# Altium PCB 388D_Control_v1_PCB1.PcbDoc (part 1 of 7)
Units mil, origin at the board's own origin, x right, y up, seen from the top; angles counter-clockwise.
Board outline 3431 x 3800 mil, 6 copper layers (Top Layer, Singal Layer 2, Signal layer 3, Signal Layer 4, Signal Layer 5, Bottom Layer), stack 32.7 mil thick; 270 components, 383 nets, 1462 pads, 899 vias.
Unrouted connection lines stored in the file: 19.
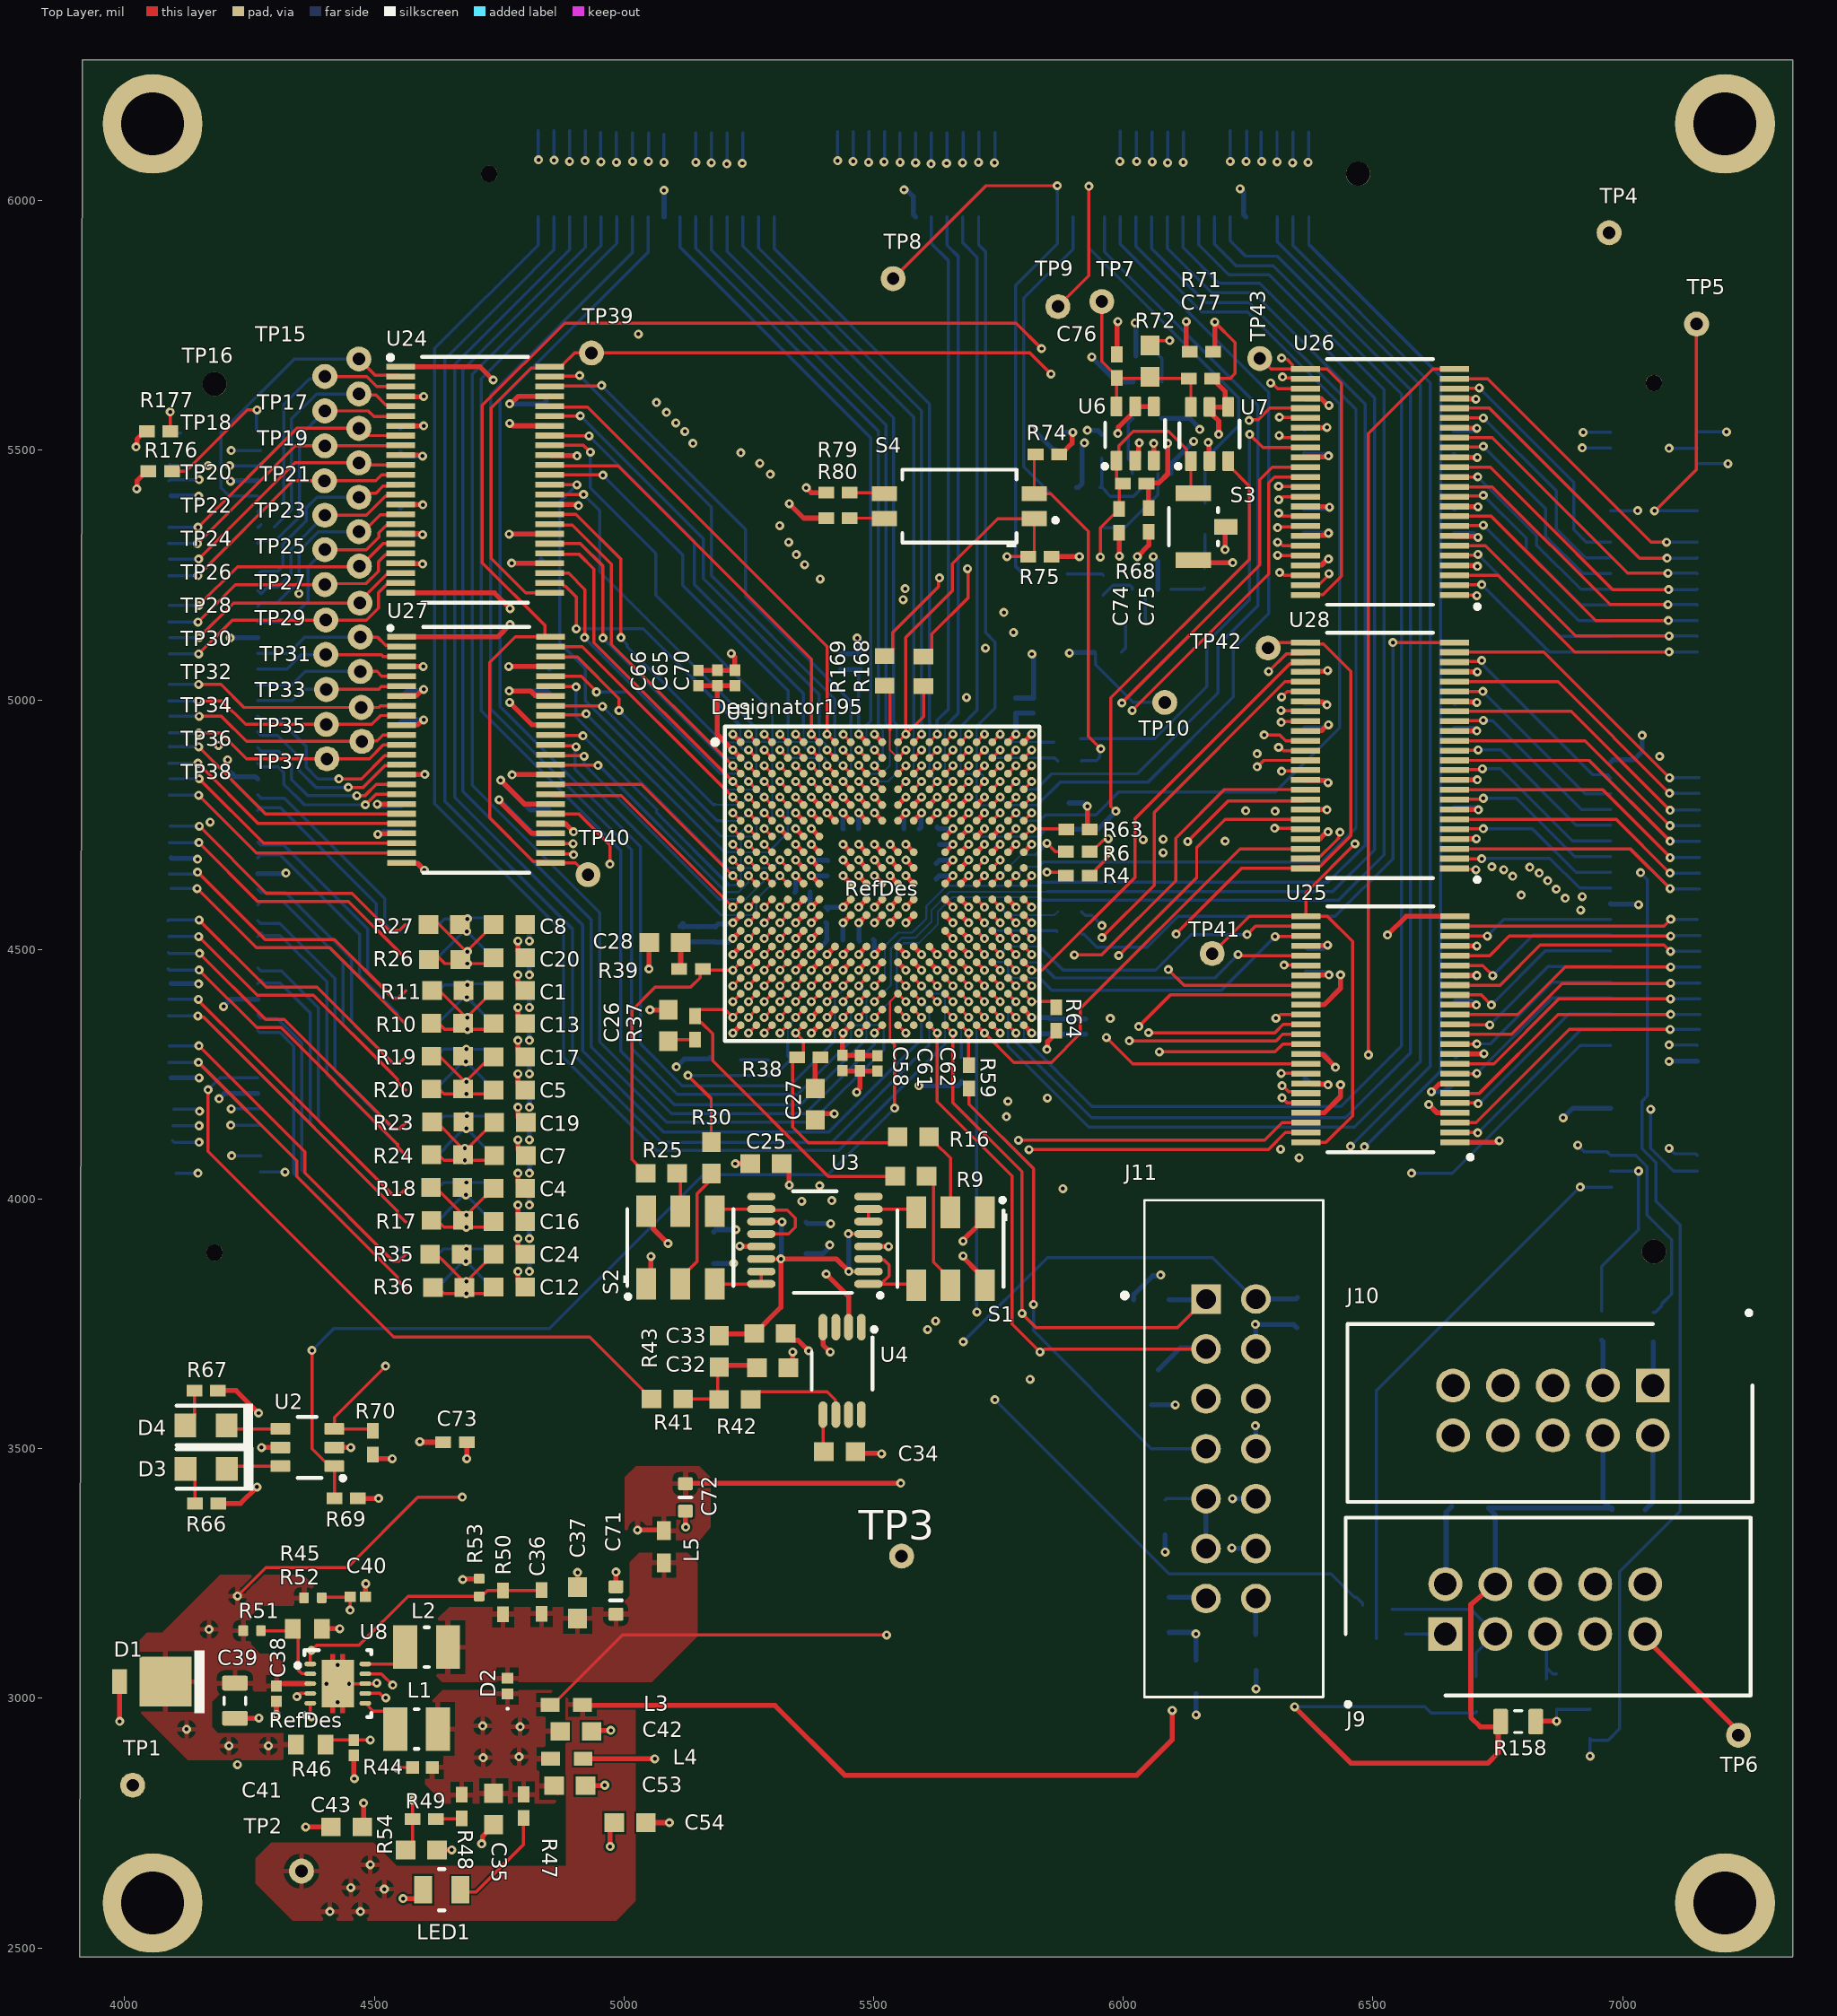
[diagram p0: Top Layer view]
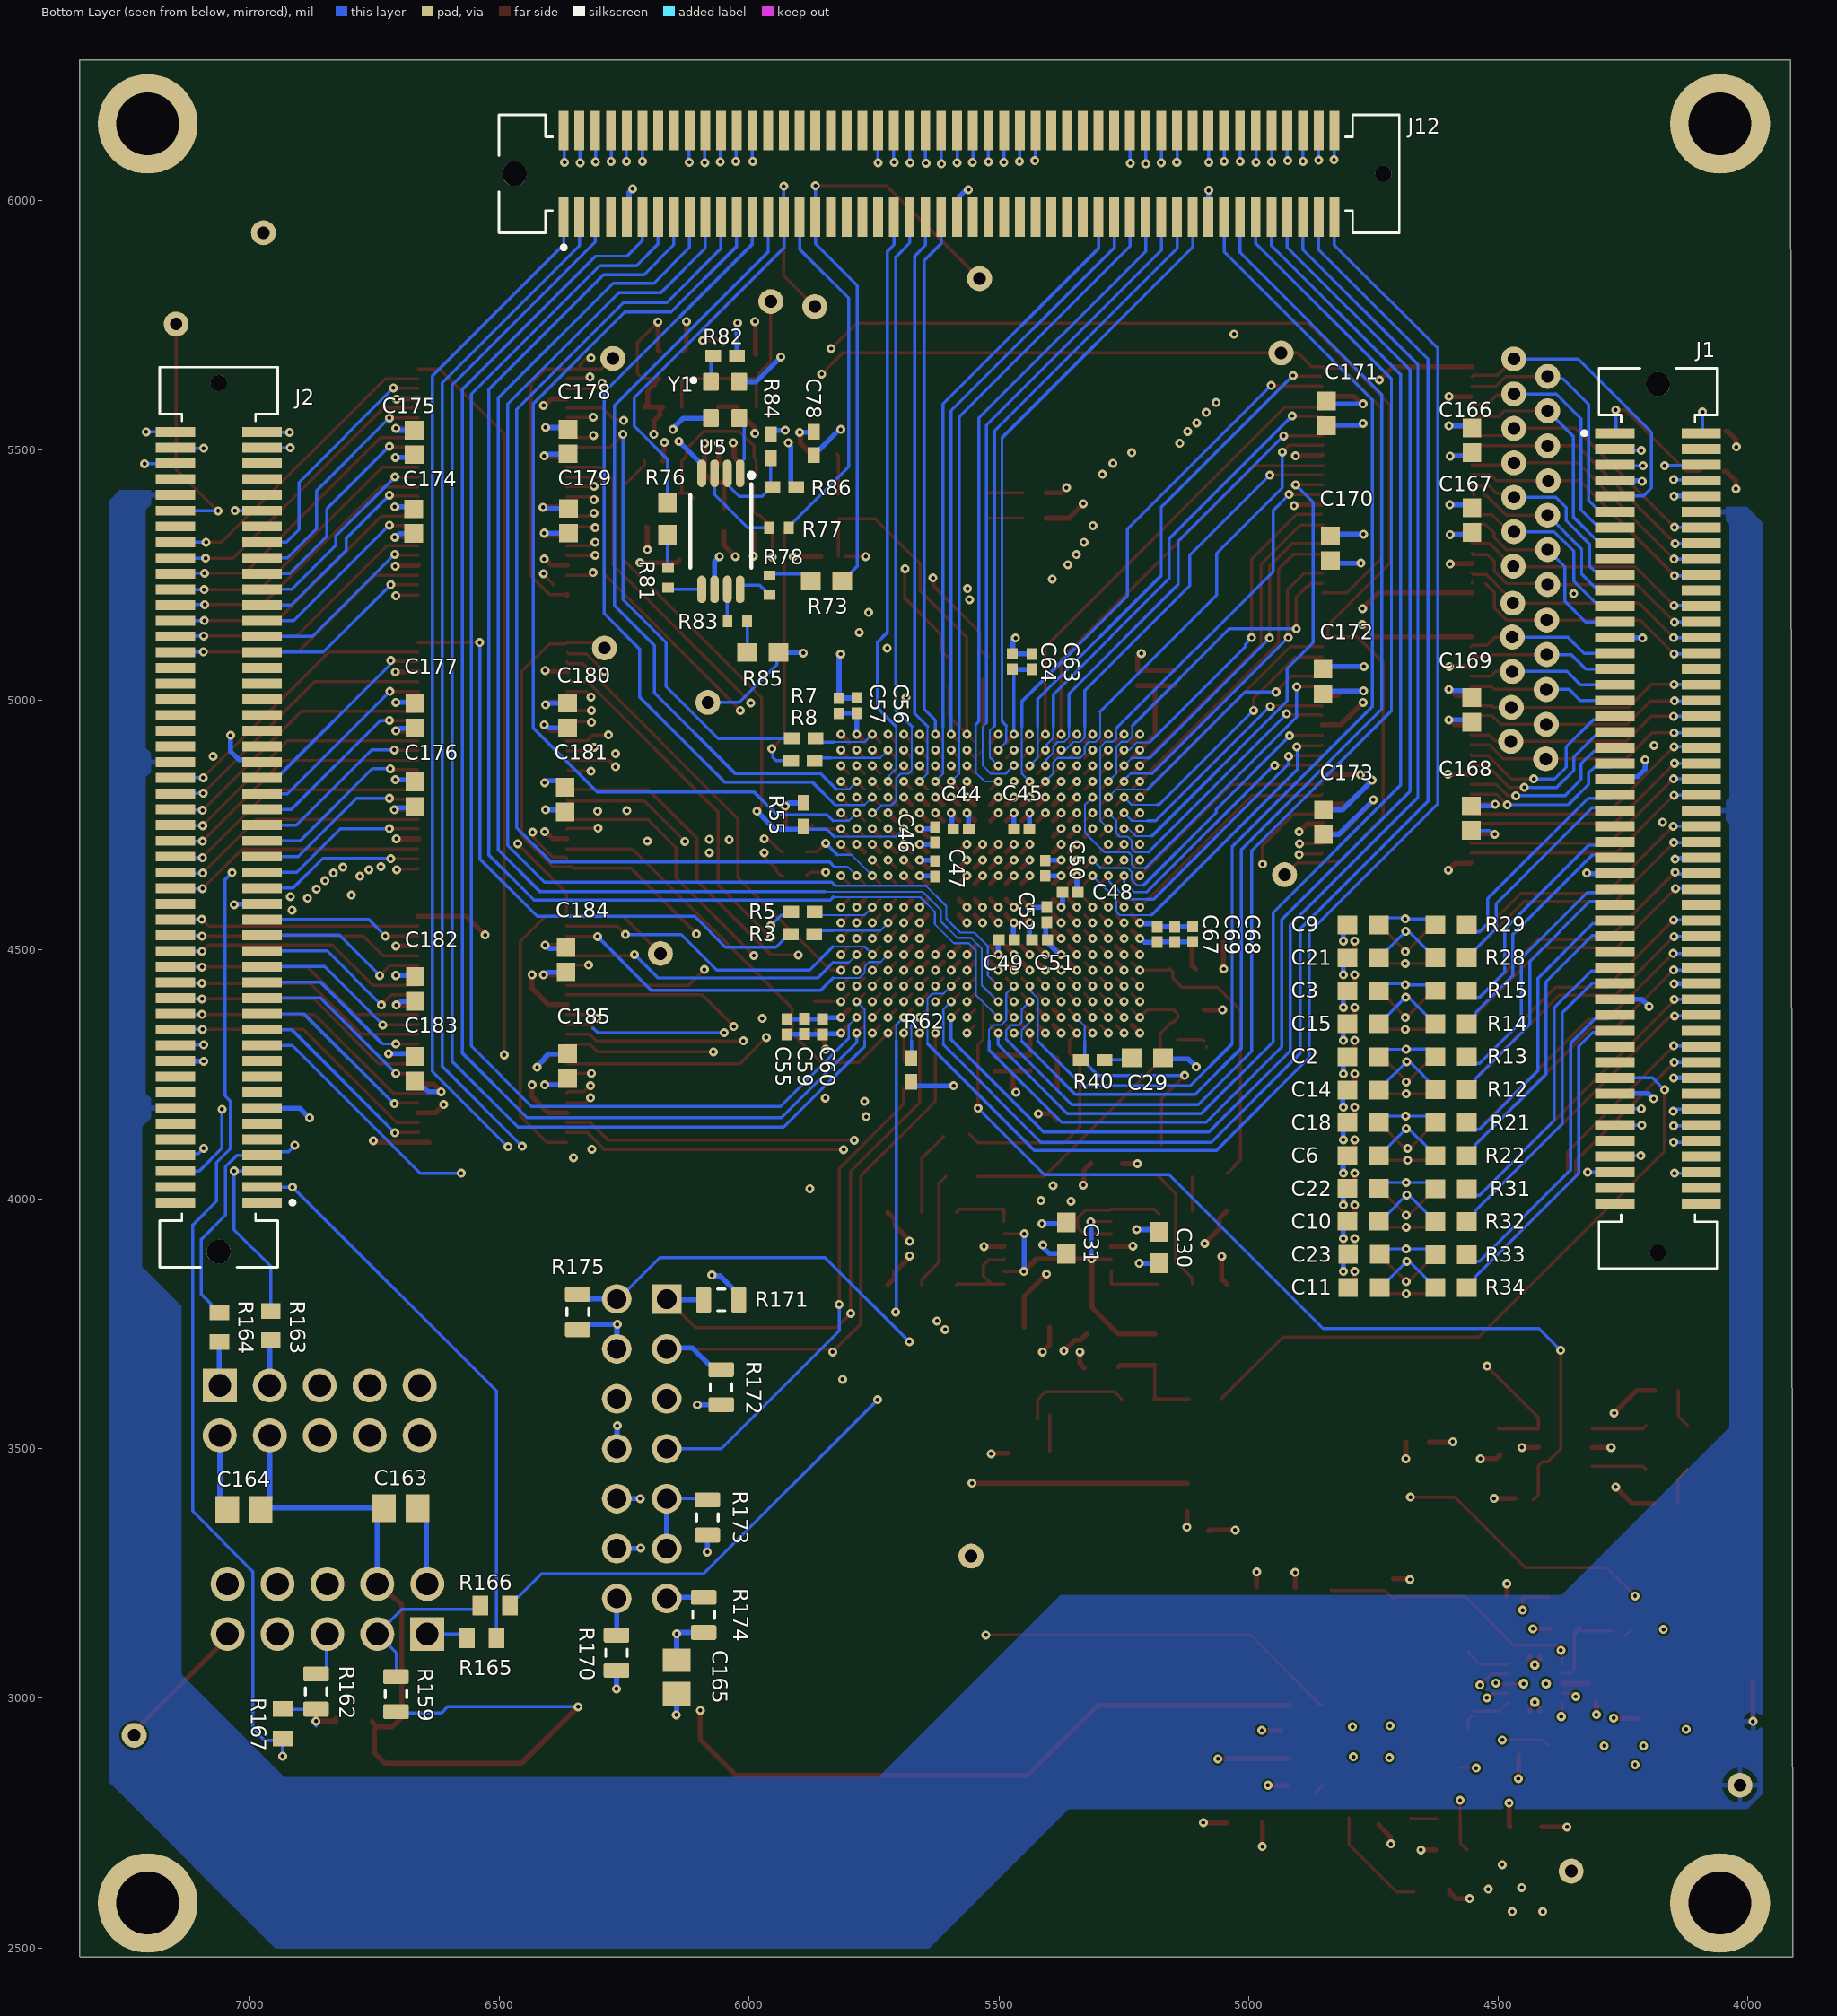
[diagram p1: Bottom Layer view, seen from below]
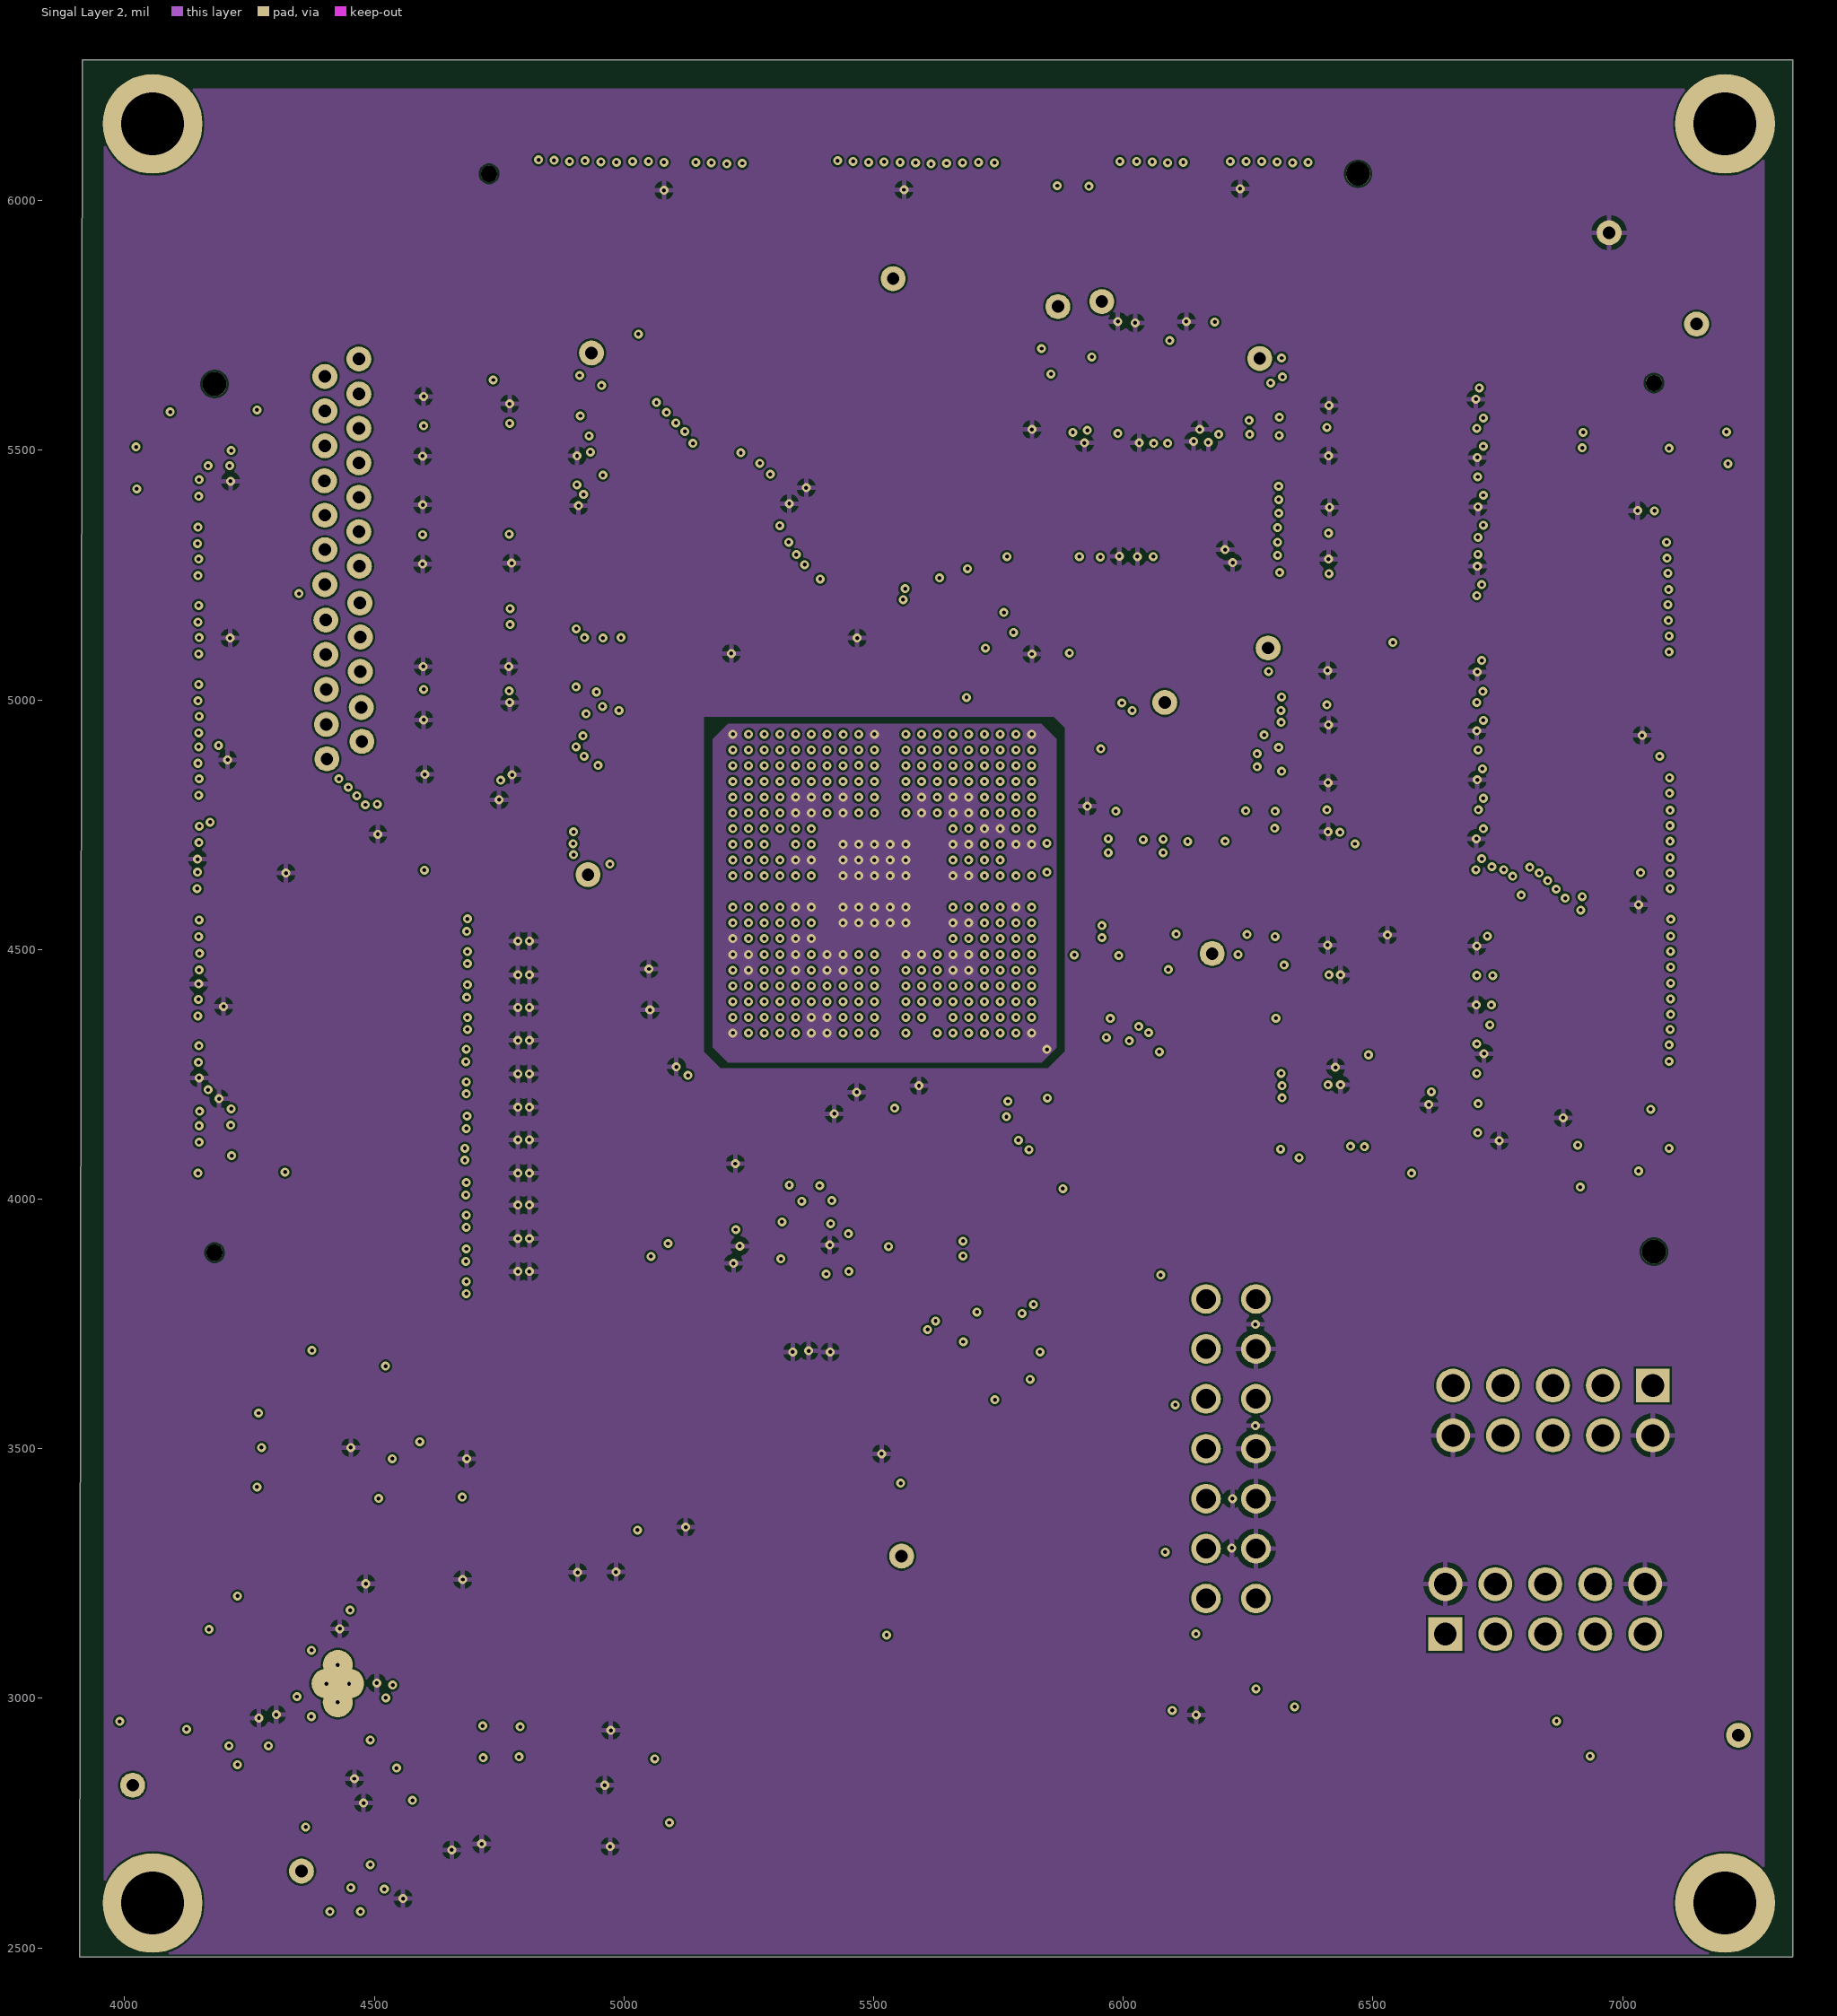
[diagram p2: Singal Layer 2]
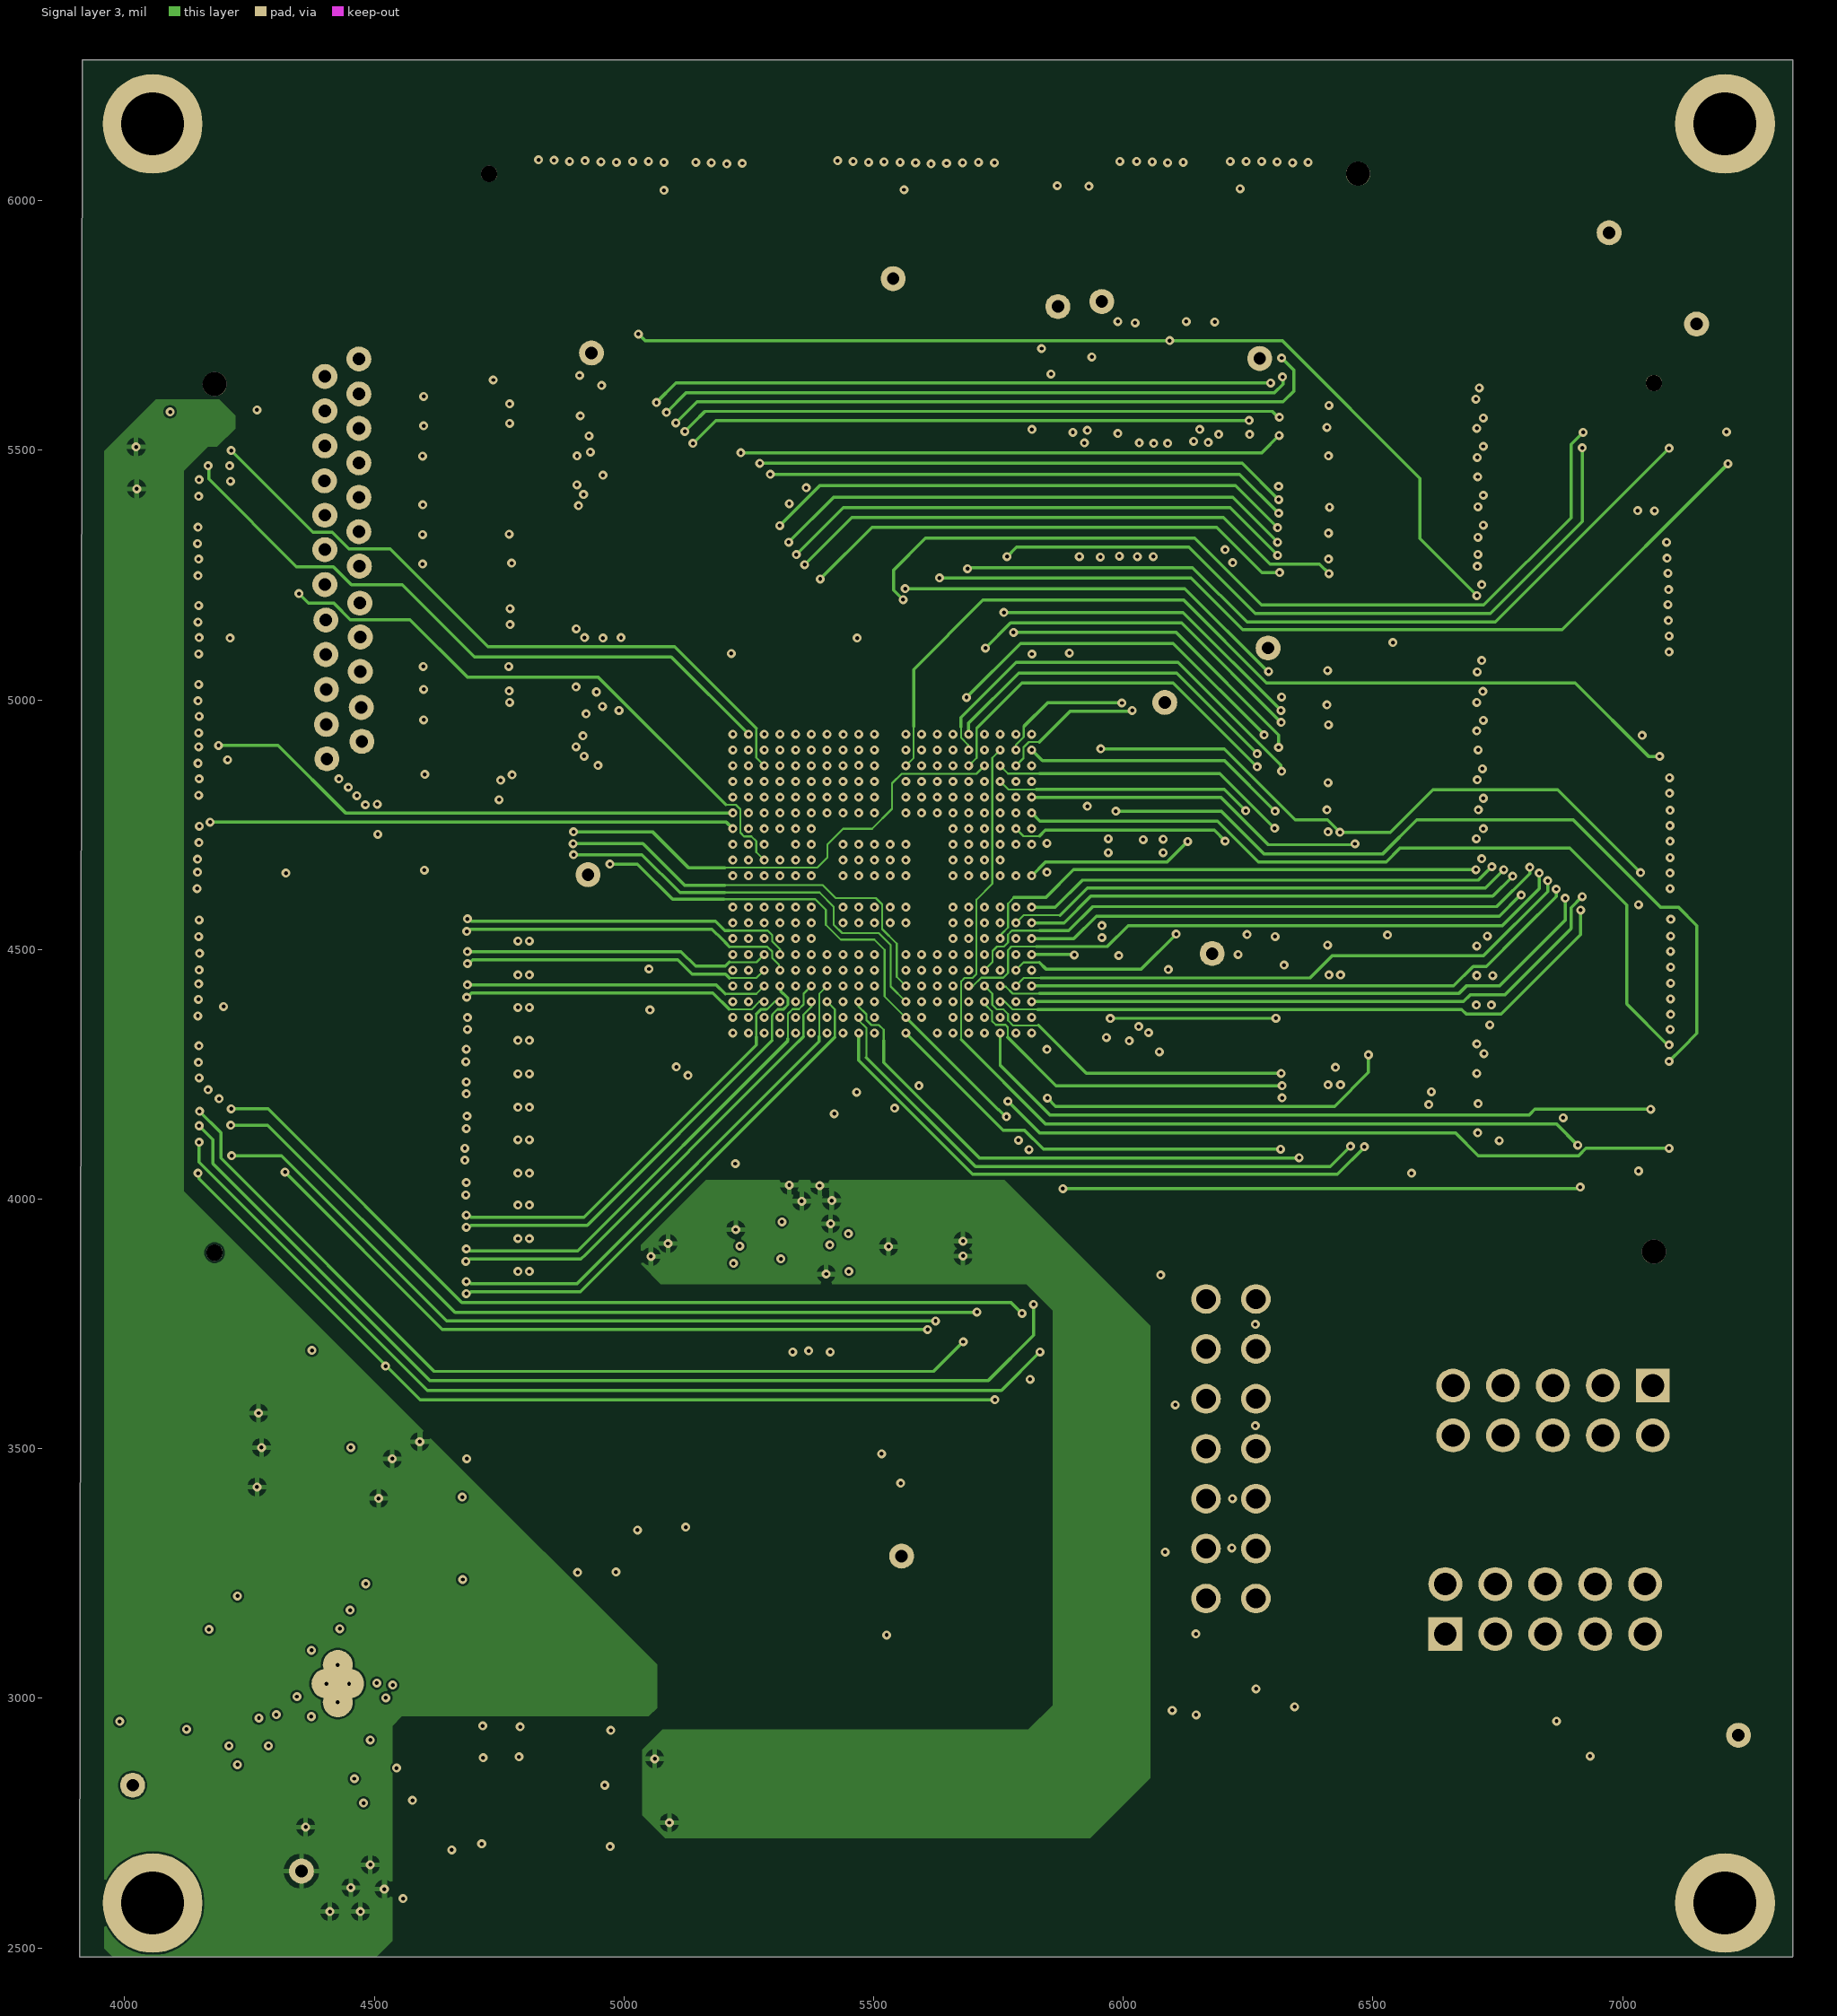
[diagram p3: Signal layer 3]
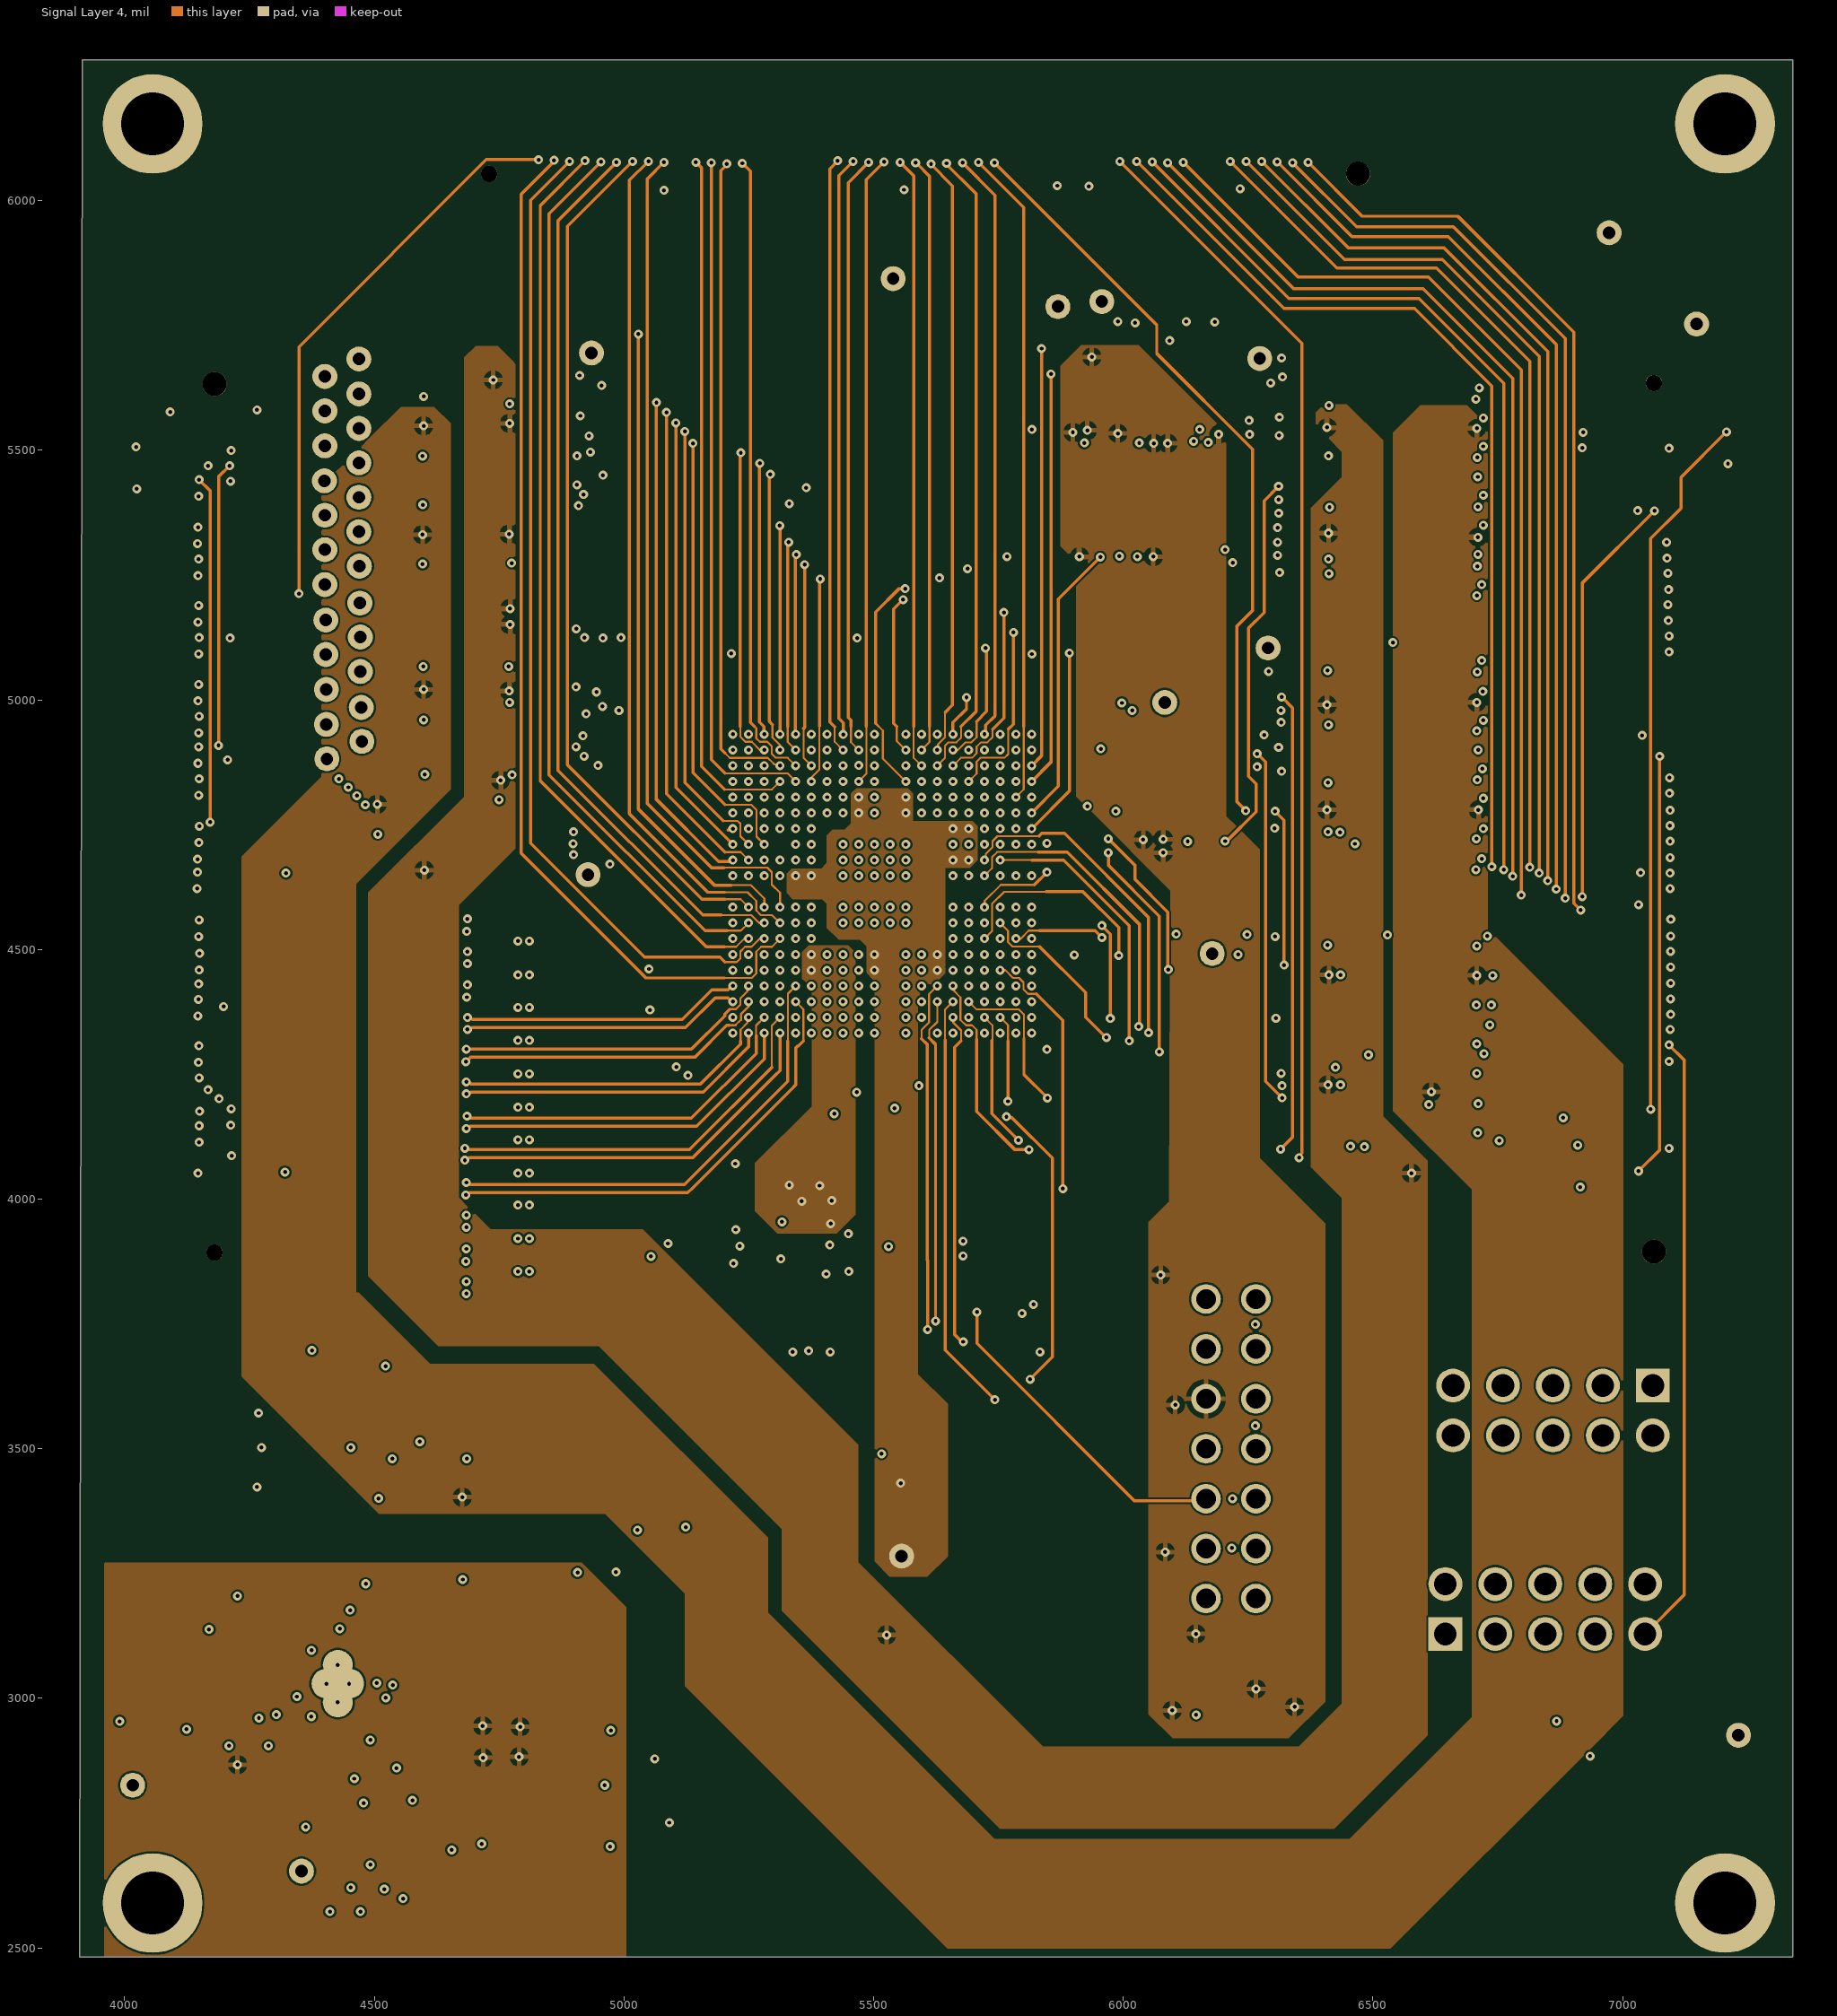
[diagram p4: Signal Layer 4]
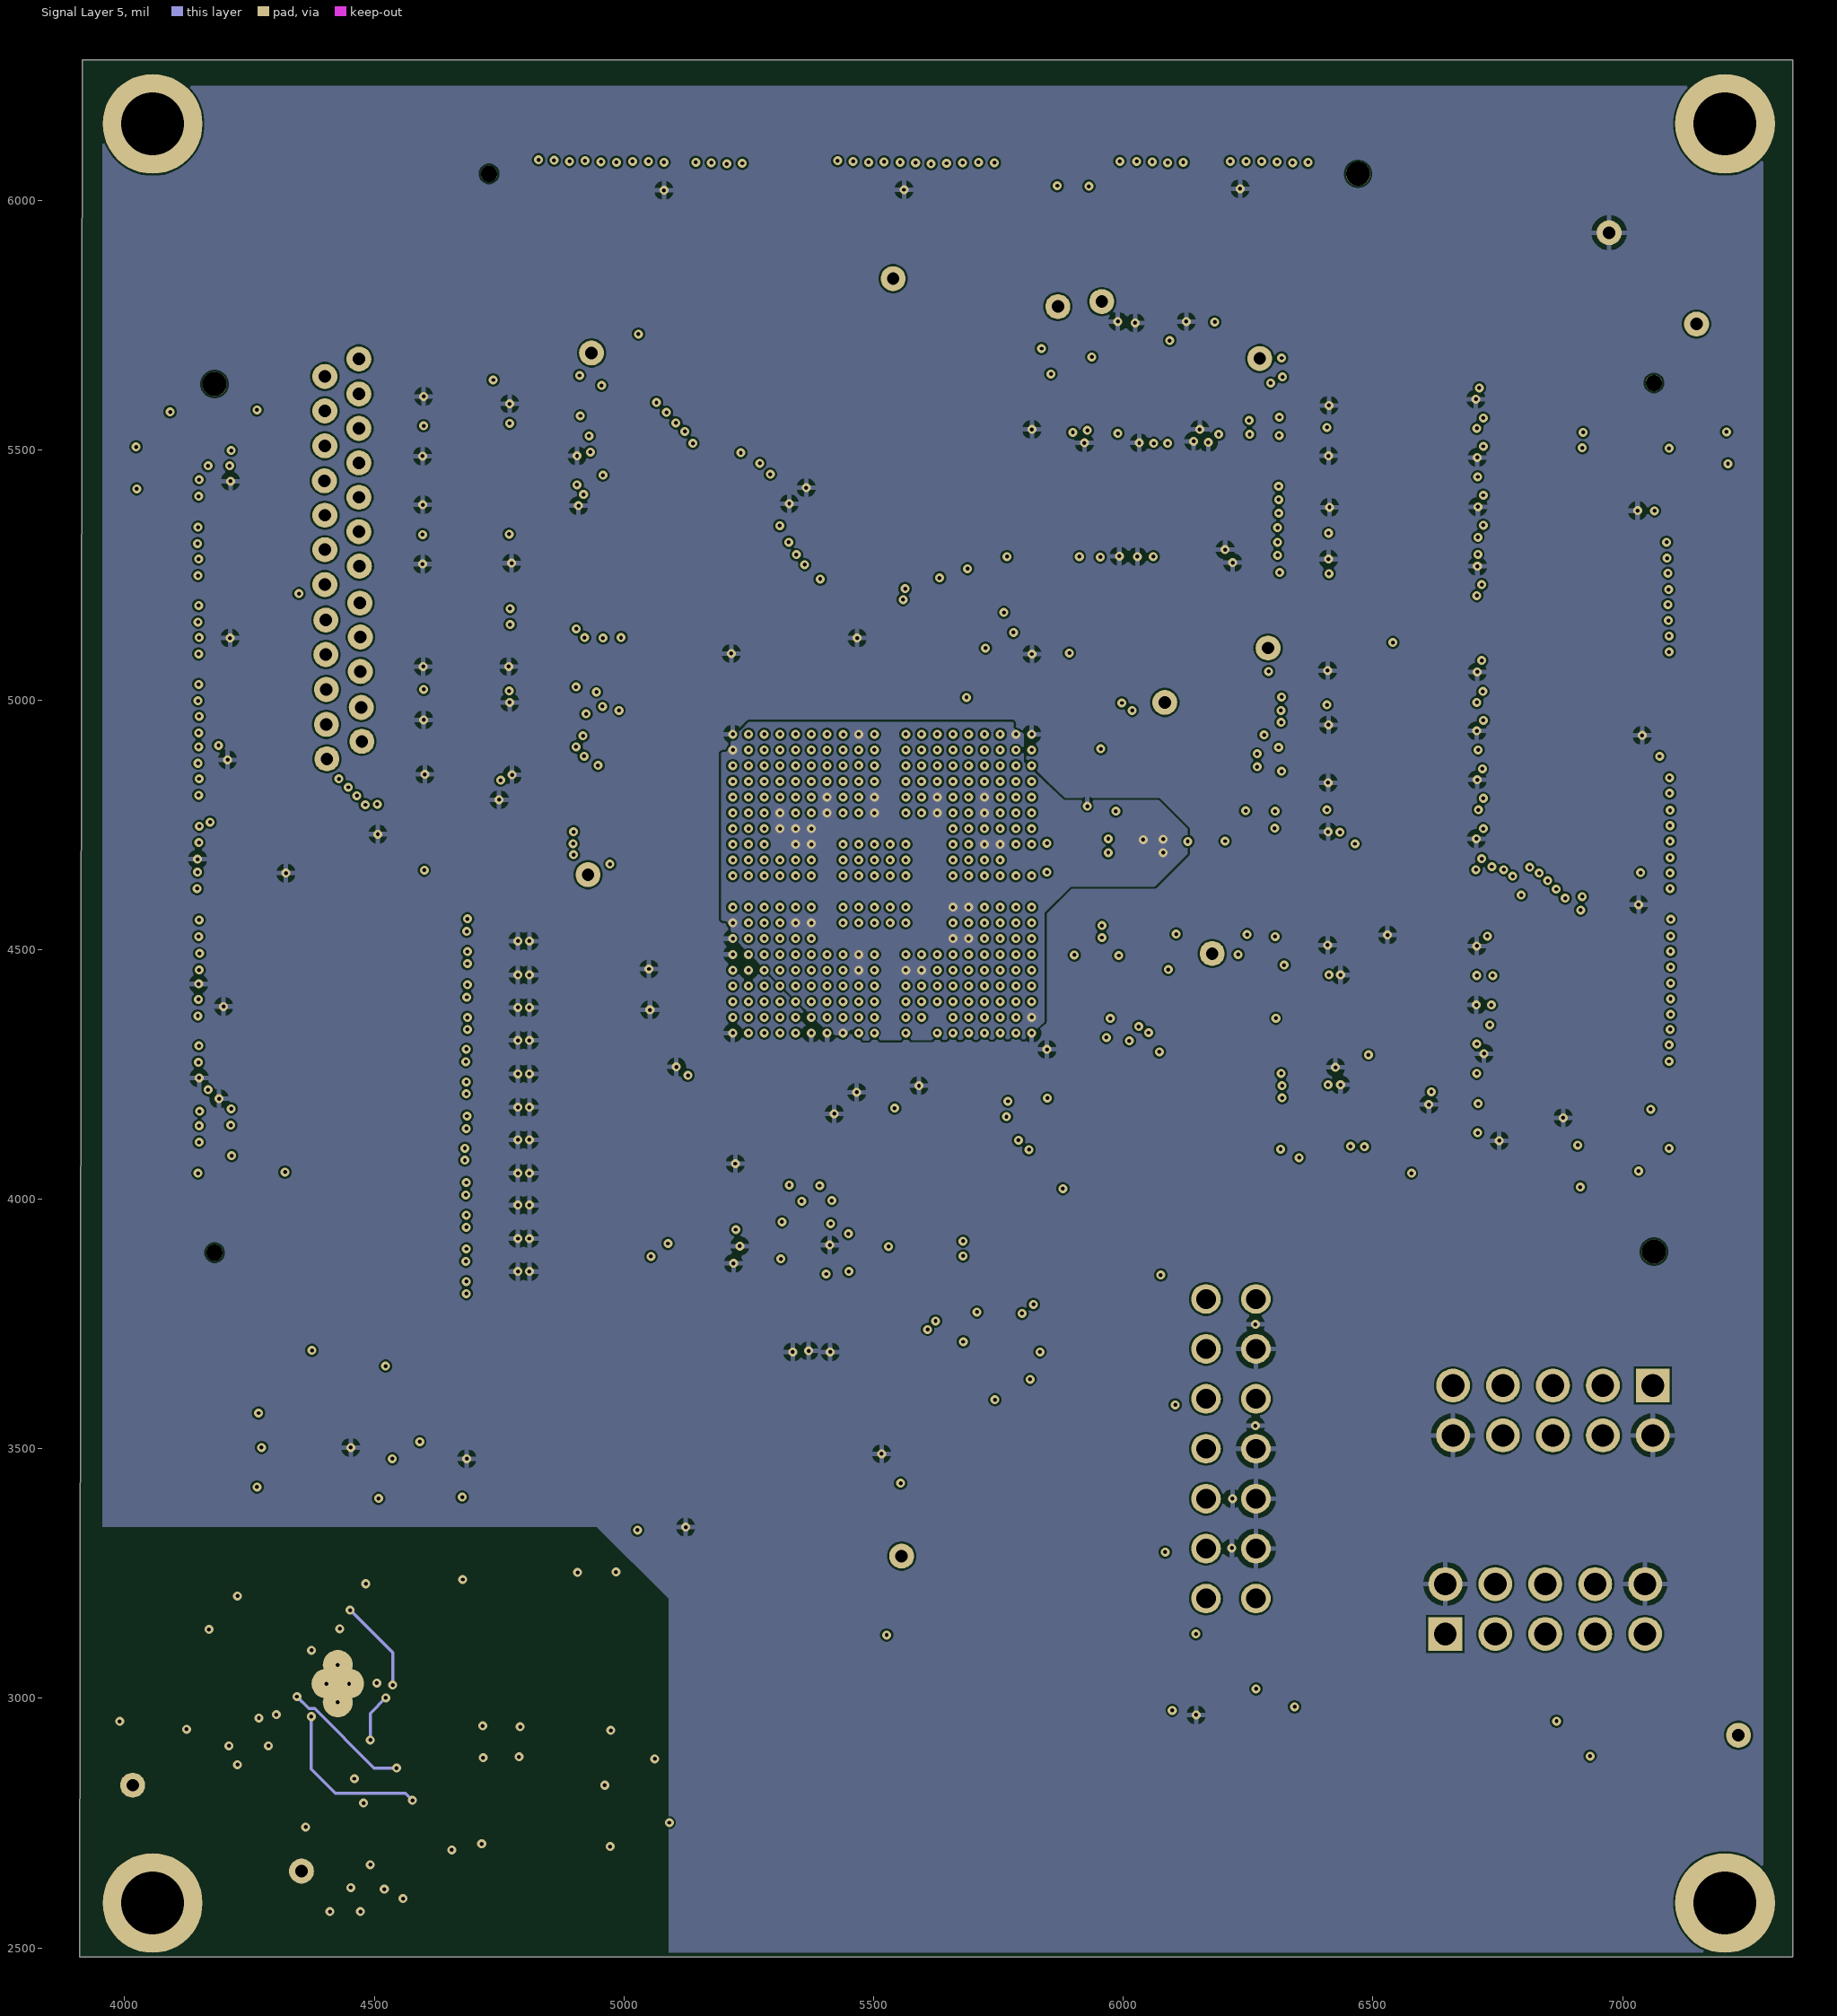
[diagram p5: Signal Layer 5]
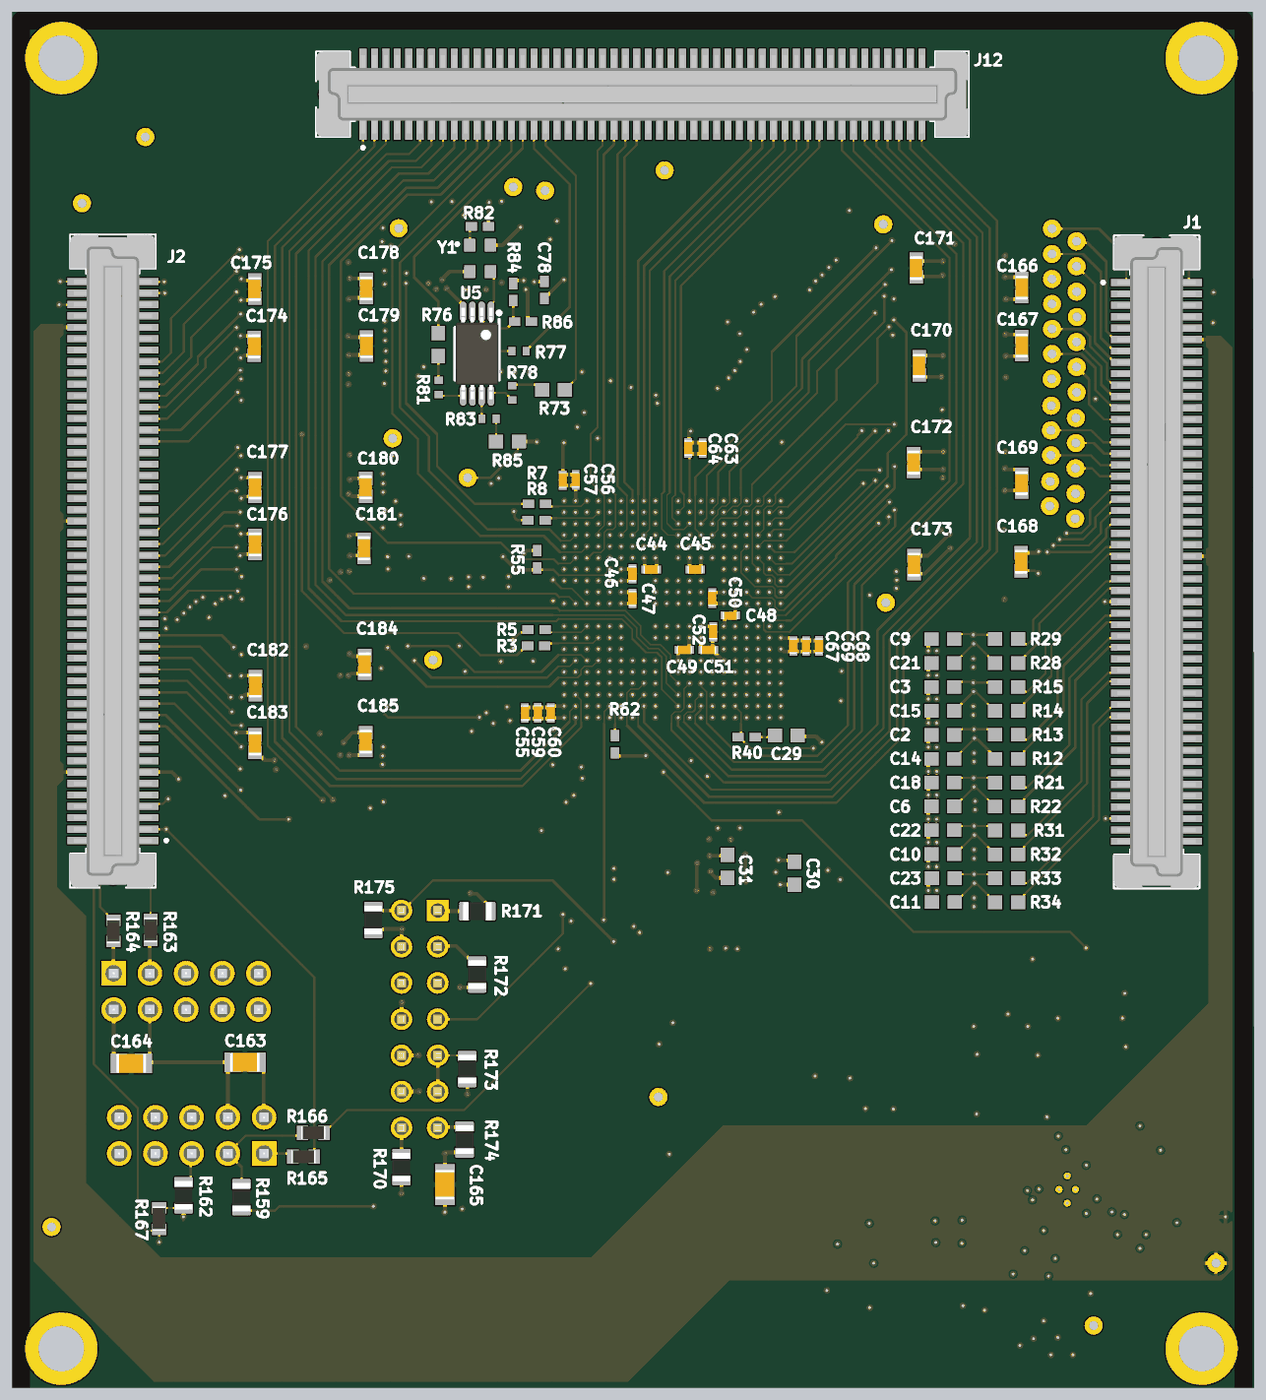
[diagram p10: 3D render of the assembled board from below, using the file's embedded part models]

## Layer stack, top to bottom
Top Solder: solder mask 0.8, Solder Resist, Dk 3.5
Top Layer: signal copper 1.45
Dielectric 1: prepreg 5, FR-4, Dk 4.1
Singal Layer 2: signal copper 1.2
Dielectric 2: core 5, FR-4, Dk 4.1
Signal layer 3: signal copper 1.2
Dielectric 3: prepreg 5, FR-4, Dk 4.8
Signal Layer 4: signal copper 1.2
Dielectric 4: core 5, FR-4, Dk 4.1
Signal Layer 5: signal copper 1.2
Dielectric 5: prepreg 5, FR-4, Dk 4.1
Bottom Layer: signal copper 1.45
Bottom Solder: solder mask 0.8, Solder Resist, Dk 3.5

## Board outline
3915,6282 7341,6282 7341,2483 7340,2482 3910,2482

## Design rules (kind name [scope] priority, off if disabled: settings)
Clearance [All] p1: gap=4 ignorepadtopadclearanceinfootprint=FALSE
DiffPairsRouting [All] p1: maxlimit=10 minlimit=10 mostfreqgap=10 toplayer_minwidth=4 toplayer_maxwidth=15 toplayer_prefwidth=6.25 midlayer1_minwidth=4 midlayer1_maxwidth=15 midlayer1_prefwidth=6.25 midlayer2_minwidth=4 midlayer2_maxwidth=15 midlayer2_prefwidth=6.25 midlayer3_minwidth=4 midlayer3_maxwidth=15 midlayer3_prefwidth=6.25 midlayer4_minwidth=4 midlayer4_maxwidth=15 midlayer4_prefwidth=6.25 bottomlayer_minwidth=4 bottomlayer_maxwidth=15 bottomlayer_prefwidth=6.25 maxuncoupledlength=500
PlaneConnect [All] p1: planeconnectstyle=Direct reliefexpansion=20 reliefentries=4 reliefconductorwidth=10 reliefairgap=10
PolygonConnect [All] p1: connectstyle=Relief reliefconductorwidth=10 reliefentries=4 polygonreliefangle="90 Angle" airgapwidth=10
RoutingVias [All] p1: holewidth=28 width=50 viastyle="Through Hole" minholewidth=28 minwidth=50 maxholewidth=28 maxwidth=50
SilkToSilkClearance [All] p1: silktosilkclearance=0
SolderMaskExpansion [All] p1: expansion=4 istentingtop=FALSE
SupplyNets "Schematic Supply Nets_14" [InNet('GND')] p1: voltage=0.000
SupplyNets "Schematic Supply Nets_15" [InNet('HSEC_5V0')] p2: voltage=0.000
SupplyNets "Schematic Supply Nets_7" [InNet('3V3')] p3: voltage=0.000
SupplyNets "Schematic Supply Nets_5" [InNet('IN_5V0')] p4: voltage=0.000
SupplyNets "Schematic Supply Nets_4" [InNet('VDDA_3V3')] p5: voltage=0.000
SupplyNets "Schematic Supply Nets_3" [InNet('VDD_3V3')] p6: voltage=0.000
SupplyNets "Schematic Supply Nets_1" [InNet('1V2')] p7: voltage=0.000
SupplyNets "Schematic Supply Nets" [InNet('VDD_1V2')] p8: voltage=0.000
Width [All] p1: maxlimit=10 minlimit=4 preferedwidth=6.25 minimp=50.000000 maximp=50.000000 favimp=50.000000
27 further rules are at their usual default settings.

## Classes and differential pairs
component class 9.Pwm_Buffer: C166 C167 C168 C169 C170 C171 C172 C173 C174 C175 C176 C177 C178 C179 C180 C181 C182 C183 C184 C185 TP39 TP40 TP41 TP42 TP43 U24 U25 U26 U27 U28
component class 8.Emulator_Interface: C165 J11 R170 R171 R172 R173 R174 R175
component class 5.ETH: J12
component class 3.ADC: C1 C2 C3 C4 C5 C6 C7 C8 C9 C10 C11 C12 C13 C14 C15 C16 C17 C18 C19 C20 C21 C22 C23 C24 C25 C26 C27 C28 C29 C30 C31 C32 C33 C34 R9 R10 R11 R12 R13 R14 R15 R16 R17 R18 R19 R20 R21 R22 R23 R24 R25 R26 R27 R28 R29 R30 R31 R32 R33 R34 R35 R36 R37 R38 R39 R40 R41 R42 R43 S1 S2 U1 U3 U4
component class 2.Support: C73 C74 C75 C76 C77 C78 D3 D4 R59 R62 R63 R64 R66 R67 R68 R69 R70 R71 R72 R73 R74 R75 R76 R77 R78 R79 R80 R81 R82 R83 R84 R85 R86 S3 S4 TP5 TP6 TP7 TP8 TP9 TP10 U2 U5 U6 U7 Y1
component class 1.GPIO: C163 C164 J1 J2 J9 J10 R3 R4 R5 R6 R7 R8 R158 R159 R162 R163 R164 R165 R166 R167 R168 R169 R176 R177 TP15 TP16 TP17 TP18 TP19 TP20 TP21 TP22 TP23 TP24 TP25 TP26 TP27 TP28 TP29 TP30 TP31 TP32 TP33 TP34 TP35 TP36 TP37 TP38
component class 4.Power: C35 C36 C37 C38 C39 C40 C41 C42 C43 C44 C45 C46 C47 C48 C49 C50 C51 C52 C53 C54 C55 C56 C57 C58 C59 C60 C61 C62 C63 C64 C65 C66 C67 C68 C69 C70 C71 C72 D1 D2 L1 L2 L3 L4 L5 LED1 R44 R45 R46 R47 R48 R49 R50 R51 R52 R53 R54 R55 TP1 TP2 TP3 TP4 U8
differential pair D4D5: +D4D5_P -D4D5_N
differential pair D2D3: +D2D3_P -D2D3_N
differential pair D0D1: +D0D1_P -D0D1_N
differential pair C4C5: +C4C5_P -C4C5_N
differential pair C2C3: +C2C3_P -C2C3_N
differential pair B4B5: +B4B5_P -B4B5_N
differential pair B2B3: +B2B3_P -B2B3_N
differential pair B0B1: +B0B1_P -B0B1_N
differential pair ADC_IN1415: +ADC_IN1415_P -ADC_IN1415_N
differential pair ADC_D4D5: +ADC_D4D5_P -ADC_D4D5_N
differential pair ADC_D2D3: +ADC_D2D3_P -ADC_D2D3_N
differential pair ADC_D0D1: +ADC_D0D1_P -ADC_D0D1_N
differential pair ADC_C4C5: +ADC_C4C5_P -ADC_C4C5_N
differential pair ADC_C2C3: +ADC_C2C3_P -ADC_C2C3_N
differential pair ADC_B4B5: +ADC_B4B5_P -ADC_B4B5_N
differential pair ADC_B2B3: +ADC_B2B3_P -ADC_B2B3_N
differential pair ADC_B0B1: +ADC_B0B1_P -ADC_B0B1_N
differential pair ADC_A4A5: +ADC_A4A5_P -ADC_A4A5_N
differential pair ADC_A2A3: +ADC_A2A3_P -ADC_A2A3_N
differential pair ADC_A0A1: +ADC_A0A1_P -ADC_A0A1_N
differential pair A4A5: +A4A5_P -A4A5_N
differential pair A2A3: +A2A3_P -A2A3_N
differential pair A0A1: +A0A1_P -A0A1_N
differential pair 1415: +1415_P -1415_N

## Components (designator, comment, footprint, x,y, rotation, side; value= is the part's Value field where it differs from the comment)
C1 "C0603C331J5GACTU" 0603 4770.66,4417.72 r0 top value=330pF
C2 "C0603C331J5GACTU" 0603 4770.66,4284.84 r0 bottom value=330pF
C3 "C0603C331J5GACTU" 0603 4770.66,4417.22 r0 bottom value=330pF
C4 "C0603C331J5GACTU" 0603 4770.66,4021.56 r0 top value=330pF
C5 "C0603C331J5GACTU" 0603 4770.66,4218.71 r0 top value=330pF
C6 "C0603C331J5GACTU" 0603 4770.66,4087.5 r0 bottom value=330pF
C7 "C0603C331J5GACTU" 0603 4771.69,4087.39 r0 top value=330pF
C8 "C0603C331J5GACTU" 0603 4770.66,4549.92 r0 top value=330pF
C9 "C0603C331J5GACTU" 0603 4770.66,4549.1 r0 bottom value=330pF
C10 "C0603C331J5GACTU" 0603 4770.66,3955.61 r0 bottom value=330pF
C11 "C0603C331J5GACTU" 0603 4769.19,3823.32 r0 bottom value=330pF
C12 "C0603C331J5GACTU" 0603 4770.66,3823.73 r0 top value=330pF
C13 "C0603C331J5GACTU" 0603 4770.66,4351.78 r0 top value=330pF
C14 "C0603C331J5GACTU" 0603 4770.66,4218.71 r0 bottom value=330pF
C15 "C0603C331J5GACTU" 0603 4770.66,4351.27 r0 bottom value=330pF
C16 "C0603C331J5GACTU" 0603 4770.66,3955.43 r0 top value=330pF
C17 "C0603C331J5GACTU" 0603 4770.66,4284.84 r0 top value=330pF
C18 "C0603C331J5GACTU" 0603 4770.66,4153.44 r0 bottom value=330pF
C19 "C0603C331J5GACTU" 0603 4771.69,4153.52 r0 top value=330pF
C20 "C0603C331J5GACTU" 0603 4770.66,4483.82 r0 top value=330pF
C21 "C0603C331J5GACTU" 0603 4770.66,4483.16 r0 bottom value=330pF
C22 "C0603C331J5GACTU" 0603 4770.66,4021.56 r0 bottom value=330pF
C23 "C0603C331J5GACTU" 0603 4769.19,3889.45 r0 bottom value=330pF
C24 "C0603C331J5GACTU" 0603 4770.66,3889.67 r0 top value=330pF
C25 "C0603C104K8RACTU" 0603 5284.01,4071.1 r0 top value=0.1uF
C26 "GRM188R61A226ME15D" 0603 5089.01,4348.1 r90 top value=22uF
C27 "GRM188R61A226ME15D" 0603 5383.01,4190.1 r270 top value=22uF
C28 "GRM188R61A226ME15D" 0603 5082.01,4514.1 r180 top value=22uF
C29 "GRM188R61A226ME15D" 0603 5203.01,4283.1 r180 bottom value=22uF
C30 "C0603C104K8RACTU" 0603 5180,3903 r270 bottom value=0.1uF
C31 "C0603C225K9PACTU" 0603 5365,3922 r270 bottom value=2.2uF
C32 "C0603C105Z9VACTU" 0603 5298,3662 r0 top value=1uF
C33 "C0603C105Z9VACTU" 0603 5292.45,3730.9 r0 top value=1uF
C34 "C0603C105Z9VACTU" 0603 5432,3494 r0 top value=1uF
C35 "GRM188R61A226ME15D" 0603 4739,2778.35 r270 top value=22uF
C36 "885012005043" 0402 4835,3193 r90 top value=33pF
C37 "GRM188R61A226ME15D" 0603 4907,3191 r90 top value=22uF
C38 "Capacitor 0.1 uF +/- 5% 16 V 0402" CAPC1005X56X25LL10T15 4303.86,3009.5 r90 top value=0.1uF/C0402
C39 "Capacitor 22µF +/-40% 16V 0805" CAPC0805(2012)145_L 4220.86,2995.5 r90 top value=22μF/C0805
C40 "Capacitor 0.1 uF +/- 5% 16 V 0402" CAPC1005X56X25LL10T15 4466.86,3203.5 r180 top value=0.1uF/C0402
C41 "Capacitor 0.1 uF +/- 5% 16 V 0402" CAPC1005X56X25LL10T15 4458.86,2901.15 r90 top value=0.1uF/C0402
C42 "C0603C225K8PACTU" 0603 4903.75,2934 r0 top value=2.2uF
C43 "C0603C225K8PACTU" 0603 4444.5,2742.35 r0 top value=2.2uF
C44 "Capacitor 0.1 uF +/- 5% 16 V 0402" CAPC1005X56X25LL10T15 5576.05,4741.74 r180 bottom value=0.1uF/C0402
C45 "Capacitor 0.1 uF +/- 5% 16 V 0402" CAPC1005X56X25LL10T15 5454.4,4741.74 r0 bottom value=0.1uF/C0402
C46 "Capacitor 0.1 uF +/- 5% 16 V 0402" CAPC1005X56X25LL10T15 5627.4,4729.74 r90 bottom value=0.1uF/C0402
C47 "Capacitor 0.1 uF +/- 5% 16 V 0402" CAPC1005X56X25LL10T15 5627.4,4661.74 r90 bottom value=0.1uF/C0402
C48 "Capacitor 0.1 uF +/- 5% 16 V 0402" CAPC1005X56X25LL10T15 5357.4,4614.74 r180 bottom value=0.1uF/C0402
C49 "Capacitor 0.1 uF +/- 5% 16 V 0402" CAPC1005X56X25LL10T15 5484.4,4519.74 r0 bottom value=0.1uF/C0402
C50 "Capacitor 0.1 uF +/- 5% 16 V 0402" CAPC1005X56X25LL10T15 5407.4,4662.74 r270 bottom value=0.1uF/C0402
C51 "Capacitor 0.1 uF +/- 5% 16 V 0402" CAPC1005X56X25LL10T15 5418.4,4519.74 r180 bottom value=0.1uF/C0402
C52 "Capacitor 0.1 uF +/- 5% 16 V 0402" CAPC1005X56X25LL10T15 5404.4,4569.74 r270 bottom value=0.1uF/C0402
C53 "C0603C225K8PACTU" 0603 4891.5,2825 r0 top value=2.2uF
C54 "C0603C225K8PACTU" 0603 5012.35,2751 r180 top value=2.2uF
C55 "Capacitor 0.1 uF +/- 5% 16 V 0402" CAPC1005X56X25LL10T15 5924.43,4345.38 r90 bottom value=0.1uF/C0402
C56 "Capacitor 0.1 uF +/- 5% 16 V 0402" CAPC1005X56X25LL10T15 5784.4,4988.74 r270 bottom value=0.1uF/C0402
C57 "Capacitor 0.1 uF +/- 5% 16 V 0402" CAPC1005X56X25LL10T15 5820.19,4988.28 r270 bottom value=0.1uF/C0402
C58 "Capacitor 0.1 uF +/- 5% 16 V 0402" CAPC1005X56X25LL10T15 5437.64,4272.68 r90 top value=0.1uF/C0402
C59 "Capacitor 0.1 uF +/- 5% 16 V 0402" CAPC1005X56X25LL10T15 5889.33,4345.96 r90 bottom value=0.1uF/C0402
C60 "Capacitor 0.1 uF +/- 5% 16 V 0402" CAPC1005X56X25LL10T15 5853.43,4345.38 r90 bottom value=0.1uF/C0402
C61 "Capacitor 0.1 uF +/- 5% 16 V 0402" CAPC1005X56X25LL10T15 5472.64,4272.33 r90 top value=0.1uF/C0402
C62 "Capacitor 0.1 uF +/- 5% 16 V 0402" CAPC1005X56X25LL10T15 5507.64,4271.98 r90 top value=0.1uF/C0402
C63 "Capacitor 0.1 uF +/- 5% 16 V 0402" CAPC1005X56X25LL10T15 5433.59,5076.6 r270 bottom value=0.1uF/C0402
C64 "Capacitor 0.1 uF +/- 5% 16 V 0402" CAPC1005X56X25LL10T15 5473.59,5077.09 r270 bottom value=0.1uF/C0402
C65 "Capacitor 0.1 uF +/- 5% 16 V 0402" CAPC1005X56X25LL10T15 5187.01,5044.1 r270 top value=0.1uF/C0402
C66 "Capacitor 0.1 uF +/- 5% 16 V 0402" CAPC1005X56X25LL10T15 5149.11,5043.68 r270 top value=0.1uF/C0402
C67 "Capacitor 0.1 uF +/- 5% 16 V 0402" CAPC1005X56X25LL10T15 5183.28,4530.24 r90 bottom value=0.1uF/C0402
C68 "Capacitor 0.1 uF +/- 5% 16 V 0402" CAPC1005X56X25LL10T15 5112.38,4530.67 r90 bottom value=0.1uF/C0402
C69 "Capacitor 0.1 uF +/- 5% 16 V 0402" CAPC1005X56X25LL10T15 5148.28,4530.24 r90 bottom value=0.1uF/C0402
C70 "Capacitor 0.1 uF +/- 5% 16 V 0402" CAPC1005X56X25LL10T15 5222.01,5044.1 r270 top value=0.1uF/C0402
C71 "Capacitor 10µF +/-20% 10V 0603" CAPC0603(1608)100_L 4984,3196 r270 top value=10μF/C0603
C72 "Capacitor 10µF +/-20% 10V 0603" CAPC0603(1608)100_L 5123,3402.5 r90 top value=10μF/C0603
C73 "CL05B104KP5NNNC" 0402 4661.62,3513 r0 top value=0.1uF
C74 "C0402C103J5RACTU" 0402 5991.72,5358.71 r270 top value=0.01uF
C75 "CL05B104KP5NNNC" 0402 6050.72,5360.71 r270 top value=0.1uF
C76 "C0402C103J5RACTU" 0402 5986.72,5668.57 r90 top value=0.01uF
C77 "CL05B104KP5NNNC" 0402 6156.42,5697.9 r180 top value=0.1uF
C78 "CL05B104KP5NNNC" 0402 5871,5513.76 r270 bottom value=0.1uF
C163 "C2012" CAPC2013X135X45NL10T25 6698,3381 r180 bottom value=0.1uF/0805
C164 "C2012" CAPC2013X135X45NL10T25 7012,3378 r0 bottom value=0.1uF/0805
C165 "C2012" CAPC2013X135X45NL10T25 6145.5,3043 r270 bottom value=10μF/2012
C166 "Capacitor 100 nF +/-10% 50 V 0603" CAPC1608X90X40NL10T20 4552.7,5520.13 r270 bottom value=0.1uF/C0603/50V
C167 "Capacitor 100 nF +/-10% 50 V 0603" CAPC1608X90X40NL10T20 4552.7,5360.13 r90 bottom value=0.1uF/C0603/50V
C168 "Capacitor 100 nF +/-10% 50 V 0603" CAPC1608X90X40NL10T20 4554.01,4763.1 r270 bottom value=0.1uF/C0603/50V
C169 "Capacitor 100 nF +/-10% 50 V 0603" CAPC1608X90X40NL10T20 4553.01,4980.1 r270 bottom value=0.1uF/C0603/50V
C170 "Capacitor 100 nF +/-10% 50 V 0603" CAPC1608X90X40NL10T20 4836,5304 r270 bottom value=0.1uF/C0603/50V
C171 "Capacitor 100 nF +/-10% 50 V 0603" CAPC1608X90X40NL10T20 4844.01,5574.1 r90 bottom value=0.1uF/C0603/50V
C172 "Capacitor 100 nF +/-10% 50 V 0603" CAPC1608X90X40NL10T20 4851.01,5037.1 r90 bottom value=0.1uF/C0603/50V
C173 "Capacitor 100 nF +/-10% 50 V 0603" CAPC1608X90X40NL10T20 4850,4755 r270 bottom value=0.1uF/C0603/50V
C174 "Capacitor 100 nF +/-10% 50 V 0603" CAPC1608X90X40NL10T20 6672,5358 r90 bottom value=0.1uF/C0603/50V
C175 "Capacitor 100 nF +/-10% 50 V 0603" CAPC1608X90X40NL10T20 6671,5516 r270 bottom value=0.1uF/C0603/50V
C176 "Capacitor 100 nF +/-10% 50 V 0603" CAPC1608X90X40NL10T20 6670,4811 r90 bottom value=0.1uF/C0603/50V
C177 "Capacitor 100 nF +/-10% 50 V 0603" CAPC1608X90X40NL10T20 6670,4968 r270 bottom value=0.1uF/C0603/50V
C178 "Capacitor 100 nF +/-10% 50 V 0603" CAPC1608X90X40NL10T20 6363.01,5517.78 r270 bottom value=0.1uF/C0603/50V
C179 "Capacitor 100 nF +/-10% 50 V 0603" CAPC1608X90X40NL10T20 6362.01,5358.78 r90 bottom value=0.1uF/C0603/50V
C180 "Capacitor 100 nF +/-10% 50 V 0603" CAPC1608X90X40NL10T20 6364.01,4968.78 r270 bottom value=0.1uF/C0603/50V
C181 "Capacitor 100 nF +/-10% 50 V 0603" CAPC1608X90X40NL10T20 6369,4800.39 r90 bottom value=0.1uF/C0603/50V
C182 "Capacitor 100 nF +/-10% 50 V 0603" CAPC1608X90X40NL10T20 6669,4421 r270 bottom value=0.1uF/C0603/50V
C183 "Capacitor 100 nF +/-10% 50 V 0603" CAPC1608X90X40NL10T20 6670,4261 r90 bottom value=0.1uF/C0603/50V
C184 "Capacitor 100 nF +/-10% 50 V 0603" CAPC1608X90X40NL10T20 6367.01,4479.78 r90 bottom value=0.1uF/C0603/50V
C185 "Capacitor 100 nF +/-10% 50 V 0603" CAPC1608X90X40NL10T20 6364.01,4266.39 r90 bottom value=0.1uF/C0603/50V
D1 "CMP-004-00076-1" POWERMITE 4035.86,3033.5 r180 top value=10V
D2 "CFSH05-20L_TR" CFSH0520LTRPBFREE 4766.86,3024.5 r90 top
D3 "150080SS75000" WL-SMCW_RED_0805 4163.27,3459.55 r180 top value=Red
D4 "150080SS75000" WL-SMCW_RED_0805 4162.93,3546.55 r180 top value=Red
J1 "10144517-101802LF" AMPHENOL_10144517-101802LF 4180.08,4762.66 r90 bottom
J2 "10144517-101802LF" AMPHENOL_10144517-101802LF 7062.62,4764.91 r270 bottom
J9 "302-S101/EasyDSP" SHDR10W66P254_2X5_2030X905X905P 6645,3129 r0 top
J10 "302-S101/EasyDSP" SHDR10W66P254_2X5_2030X905X905P 7060.4,3626.64 r180 top
J11 "SBH11-PBPC-D07-ST-BK" SULLINS_SBH11-PBPC-D07-ST-BK 6215.5,3500 r270 top
J12 "10144517-101802LF" AMPHENOL_10144517-101802LF 5600,6054 r0 bottom
L1 "LQM2HPN2R2MG0L" INDC2520X100X60NL20T20 4584.5,2938.5 r0 top value=2.2μH/L1008
L2 "LQM2HPN2R2MG0L" INDC2520X100X60NL20T20 4604.86,3102.5 r0 top value=3.3μH/L1008
L3 "BLM18AG121SN1D" MURA-BLM18-F-H1-CHIP-2_V 4884.5,2987 r0 top
L4 "BLM18AG121SN1D" MURA-BLM18-F-H1-CHIP-2_V 4885.5,2879 r0 top
L5 "BLM18AG121SN1D" MURA-BLM18-F-H1-CHIP-2_V 5080,3303.5 r90 top
LED1 "150080VS75000/D0805" LEDC2012X70N 4635,2616.35 r0 top
R3 "CRCW040239R0JNED" 0402 5893.4,4530.74 r180 bottom value=39
R4 "CRCW040239R0JNED" 0402 5909,4648 r180 top value=39
R5 "CRCW040239R0JNED" 0402 5892.4,4575.74 r180 bottom value=39
R6 "CRCW040239R0JNED" 0402 5909.01,4696.1 r180 top value=39
R7 "CRCW040239R0JNED" 0402 5891.4,4922.74 r180 bottom value=39
R8 "CRCW040239R0JNED" 0402 5892.4,4877.74 r180 bottom value=39
R9 "CRCW06030000Z0EA" 0603 5574.5,4045.76 r180 top value=0
R10 "CRCW06030000Z0EA" 0603 4645.92,4352.17 r180 top value=0
R11 "CRCW06030000Z0EA" 0603 4646.94,4417.97 r180 top value=0
R12 "CRCW06030000Z0EA" 0603 4594.41,4219.19 r180 bottom value=0
R13 "CRCW06030000Z0EA" 0603 4594.41,4285.28 r180 bottom value=0
R14 "CRCW06030000Z0EA" 0603 4594.41,4351.35 r180 bottom value=0
R15 "CRCW06030000Z0EA" 0603 4594.41,4417.42 r180 bottom value=0
R16 "CRCW06030000Z0EA" 0603 5579.51,4125.1 r180 top value=0
R17 "CRCW06030000Z0EA" 0603 4645.87,3957.39 r180 top value=0
R18 "CRCW06030000Z0EA" 0603 4644.89,4023.21 r180 top value=0
R19 "CRCW06030000Z0EA" 0603 4645.92,4286.38 r180 top value=0
R20 "CRCW06030000Z0EA" 0603 4645.92,4220.56 r180 top value=0
R21 "CRCW06030000Z0EA" 0603 4594.41,4153.15 r180 bottom value=0
R22 "CRCW06030000Z0EA" 0603 4594.41,4087.09 r180 bottom value=0
R23 "CRCW06030000Z0EA" 0603 4646.95,4154.77 r180 top value=0
R24 "CRCW06030000Z0EA" 0603 4645.92,4088.95 r180 top value=0
R25 "CRCW06030000Z0EA" 0603 5075,4051.76 r180 top value=0
R26 "CRCW06030000Z0EA" 0603 4641.15,4480.16 r180 top value=0
R27 "CRCW06030000Z0EA" 0603 4640.15,4549.98 r180 top value=0
R28 "CRCW06030000Z0EA" 0603 4594.41,4483.48 r180 bottom value=0
R29 "CRCW06030000Z0EA" 0603 4594.41,4549.55 r180 bottom value=0
R30 "CRCW06030000Z0EA" 0603 5175,4082.76 r90 top value=0
R31 "CRCW06030000Z0EA" 0603 4594.41,4021.02 r180 bottom value=0
R32 "CRCW06030000Z0EA" 0603 4594.41,3954.96 r180 bottom value=0
R33 "CRCW06030000Z0EA" 0603 4594.41,3888.89 r180 bottom value=0
R34 "CRCW06030000Z0EA" 0603 4594.41,3822.8 r180 bottom value=0
R35 "CRCW06030000Z0EA" 0603 4643.17,3889.62 r180 top value=0
R36 "CRCW06030000Z0EA" 0603 4649.17,3822.83 r180 top value=0
R37 "ERJ2BWFR100X" 0402 5142.01,4343.1 r270 top value=0.1
R38 "ERJ2BWFR100X" 0402 5370.01,4284.1 r0 top value=0.1
R39 "ERJ2BWFR100X" 0402 5134.01,4461.1 r180 top value=0.1
R40 "ERJ2BWFR100X" 0402 5312.45,4278.48 r180 bottom value=0.1
R41 "CRCW06030000Z0EA" 0603 5086.95,3599.9 r0 top value=0
R42 "CRCW06030000Z0EA" 0603 5221.95,3598.9 r0 top value=0
R43 "RC0603FR-071KL" 0603 5191,3695 r90 top value=1.00k
R44 "Resistor 0R +/- 5% 0402 100 mW" RESC1005X40X25ML05T05 4596.5,2861.5 r0 top value=0/R0402
R45 "22KR2F" RESC0402(1005)_L 4376.86,3201.5 r180 top value=22k/R0402
R46 "Resistor 0R +/- 5% 0603 100 mW" RESC1608X55X25ML10T15 4372.86,2907.5 r180 top value=0/R0603
R47 "CRCW0402680RJNED" 0402 4799,2783.97 r90 top value=680
R48 "CRCW0402340KFKED" 0402 4675,2783.35 r90 top value=340k
R49 "ERJ-2RKF2001X" 0402 4600,2758.35 r0 top value=2.00k
R50 "CRCW0402205KFKED" 0402 4758,3192 r270 top value=205k
R51 "10KR2F" RESC0402(1005)_L 4255.15,3135.5 r180 top value=10k/R0402
R52 "Resistor 100k +/-1% 0603 100 mW" RESC1608X55X25ML10T15 4365.86,3139.5 r180 top value=100k/R0603
R53 "Resistor 200K +/-1 % 0402 63 mW" RESC0402(1005)_L 4710,3222 r270 top value=200k/R0402
R54 "RT0603DRE0775KL" 0603 4594,2696.35 r180 top value=75.0k
R55 "CRCW040256R0JNED" 0402 5891,4770 r270 bottom value=56
R59 "CRCW040239R0JNED" 0402 5691.01,4245.1 r90 top value=39
R62 "CRCW04022K20JNED" 0402 5676.01,4259.1 r90 bottom value=2.2k
R63 "CRCW04022K20JNED" 0402 5909.4,4740.74 r180 top value=2.2k
R64 "RC0402FR-0710KL" 0402 5866.01,4360.74 r90 top value=10.0k
R66 "CRCW0402680RJNED" 0402 4164.12,3390.45 r180 top value=680
R67 "CRCW0402680RJNED" 0402 4163.12,3616.45 r180 top value=680
R68 "CRCW04022K20JNED" 0402 6022.72,5433.71 r0 top value=2.2k
R69 "CRCW04021M50JNED" 0402 4443.49,3400.45 r0 top value=1.5Meg
R70 "CRCW04021M50JNED" 0402 4497.12,3512.07 r270 top value=1.5Meg
R71 "CRCW04022K20JNED" 0402 6154.72,5643.71 r0 top value=2.2k
R72 "CRCW06030000Z0EA" 0603 6053.72,5678.57 r90 top value=0
R73 "CRCW06030000Z0EA" 0603 5845.5,5238 r0 bottom value=0
R74 "CRCW040256K0JNED" 0402 5848.01,5492.1 r180 top value=56k
R75 "CRCW040256K0JNED" 0402 5833,5287 r0 top value=56k
R76 "CRCW06030000Z0EA" 0603 6163.85,5362.8 r270 bottom value=0
R77 "CPF0402B10RE1" CPF0402 5940.85,5344.8 r180 bottom value=10.0
R78 "CPF0402B10RE1" CPF0402 5959.53,5229.8 r90 bottom value=10.0
R79 "CRCW04022K20JNED" 0402 5428.69,5415.21 r180 top value=2.2k
R80 "CRCW04022K20JNED" 0402 5428.69,5364.21 r0 top value=2.2k
R81 "CPF0402B10RE1" CPF0402 6162.85,5244.48 r90 bottom value=10.0
R82 "CRCW04020000Z0EDHP" 0402 6048.67,5688.95 r180 bottom value=0
R83 "CPF0402B10RE1" CPF0402 6023.85,5157.8 r180 bottom value=10.0
R84 "CRCW04020000Z0EDHP" 0402 5956.85,5507.8 r270 bottom value=0
R85 "CRCW06030000Z0EA" 0603 5973,5095 r0 bottom value=0
R86 "CRCW04020000Z0EDHP" 0402 5930,5426 r180 bottom value=0
R158 "R2012" RESC0805(2012)_L 6790.69,2953.35 r180 top value=20k/2012
R159 "R2012" RESC0805(2012)_L 6707.69,3008.35 r270 bottom value=20k/2012
R162 "R2012" RESC0805(2012)_L 6867.69,3013.35 r270 bottom value=2k/2012
R163 "Resistor 0R +/- 5% 0603 100 mW" RESC1608X55X25ML10T15 6958.4,3746.64 r270 bottom value=0/R0603
R164 "Resistor 0R +/- 5% 0603 100 mW" RESC1608X55X25ML10T15 7061.4,3743.64 r270 bottom value=0/R0603
R165 "Resistor 0R +/- 5% 0603 100 mW" RESC1608X55X25ML10T15 6536,3120 r0 bottom value=0/R0603
R166 "Resistor 0R +/- 5% 0603 100 mW" RESC1608X55X25ML10T15 6509,3186 r0 bottom value=0/R0603
R167 "Resistor 0R +/- 5% 0603 100 mW" RESC1608X55X25ML10T15 6934.69,2949.35 r90 bottom value=0/R0603
R168 "Resistor 0R +/- 5% 0603 100 mW" RESC1608X55X25ML10T15 5600.01,5057.1 r90 top value=0/R0603
R169 "Resistor 0R +/- 5% 0603 100 mW" RESC1608X55X25ML10T15 5522.01,5058.1 r90 top value=0/R0603
R170 "R2012" RESC0805(2012)_L 6266,3091 r270 bottom value=4.7k/2012
R171 "R2012" RESC0805(2012)_L 6056,3798 r180 bottom value=4.7k/2012
R172 "R2012" RESC0805(2012)_L 6056.5,3623 r270 bottom value=4.7k/2012
R173 "R2012" RESC0805(2012)_L 6084,3362 r270 bottom value=4.7k/2012
R174 "R2012" RESC0805(2012)_L 6091.5,3167 r270 bottom value=4.7k/2012
R175 "R2012" RESC0805(2012)_L 6343.5,3774 r90 bottom value=2.2k/2012
R176 "CRCW04024K70JNED" 0402 4071,5458 r180 top value=4.7k
R177 "CRCW04024K70JNED" 0402 4068,5538 r0 top value=4.7k
S1 "CAS-D20TA" SW_CAS-D20TA 5654,3900.76 r270 top
S2 "CAS-D20TA" SW_CAS-D20TA 5113,3902.76 r90 top
S3 "B3U-1100P" SW_B3U-1100P 6140.42,5346.84 r270 top
S4 "218-2LPST" SW_218-2LP 5671.69,5388.21 r180 top
TP1 "TESTPOINT" TP_50MIL-25MILHOLE 4016,2826 r0 top
TP2 "TESTPOINT" TP_50MIL-25MILHOLE 4354,2653.85 r90 top
TP3 "TESTPOINT" TP_50MIL-25MILHOLE 5556,3285 r90 top
TP4 "TESTPOINT" TP_50MIL-25MILHOLE 6973,5936 r0 top
TP5 "TESTPOINT" TP_50MIL-25MILHOLE 7148,5753 r90 top
TP6 "TESTPOINT" TP_50MIL-25MILHOLE 7232,2926 r90 top
TP7 "TESTPOINT" TP_50MIL-25MILHOLE 5957,5798 r90 top
TP8 "TESTPOINT" TP_50MIL-25MILHOLE 5539,5844 r90 top
TP9 "TESTPOINT" TP_50MIL-25MILHOLE 5869,5788 r90 top
TP10 "TESTPOINT" TP_50MIL-25MILHOLE 6083,4995 r90 top
TP15 "TESTPOINT" TP_50MIL-25MILHOLE 4469,5683 r180 top
TP16 "TESTPOINT" TP_50MIL-25MILHOLE 4401,5648 r180 top
TP17 "TESTPOINT" TP_50MIL-25MILHOLE 4469,5613 r180 top
TP18 "TESTPOINT" TP_50MIL-25MILHOLE 4469,5544 r180 top
TP19 "TESTPOINT" TP_50MIL-25MILHOLE 4401,5579 r180 top
TP20 "TESTPOINT" TP_50MIL-25MILHOLE 4401,5509 r180 top
TP21 "TESTPOINT" TP_50MIL-25MILHOLE 4469,5475 r180 top
TP22 "TESTPOINT" TP_50MIL-25MILHOLE 4469,5406 r180 top
TP23 "TESTPOINT" TP_50MIL-25MILHOLE 4400,5439 r180 top
TP24 "TESTPOINT" TP_50MIL-25MILHOLE 4401,5370 r180 top
TP25 "TESTPOINT" TP_50MIL-25MILHOLE 4469,5337 r180 top
TP26 "TESTPOINT" TP_50MIL-25MILHOLE 4470,5268 r180 top
TP27 "TESTPOINT" TP_50MIL-25MILHOLE 4401,5301 r180 top
TP28 "TESTPOINT" TP_50MIL-25MILHOLE 4401,5231 r180 top
TP29 "TESTPOINT" TP_50MIL-25MILHOLE 4471,5194 r180 top
TP30 "TESTPOINT" TP_50MIL-25MILHOLE 4472,5126 r180 top
TP31 "TESTPOINT" TP_50MIL-25MILHOLE 4403,5160 r180 top
TP32 "TESTPOINT" TP_50MIL-25MILHOLE 4403,5091 r180 top
TP33 "TESTPOINT" TP_50MIL-25MILHOLE 4472,5057 r180 top
TP34 "TESTPOINT" TP_50MIL-25MILHOLE 4474,4985 r180 top
TP35 "TESTPOINT" TP_50MIL-25MILHOLE 4404,5021 r180 top
TP36 "TESTPOINT" TP_50MIL-25MILHOLE 4404,4951 r180 top
TP37 "TESTPOINT" TP_50MIL-25MILHOLE 4475,4917 r180 top
TP38 "TESTPOINT" TP_50MIL-25MILHOLE 4405,4882 r180 top
TP39 "TESTPOINT" TP_50MIL-25MILHOLE 4935,5695 r90 top
TP40 "TESTPOINT" TP_50MIL-25MILHOLE 4928,4650 r90 top
TP41 "TESTPOINT" TP_50MIL-25MILHOLE 6178,4492 r90 top
TP42 "TESTPOINT" TP_50MIL-25MILHOLE 6290,5104 r90 top
TP43 "TESTPOINT" TP_50MIL-25MILHOLE 6273.27,5684 r90 top
U1 "TMS320F28388DZWTS" ZWT0337A-IPC_B 5517.18,4631.99 r0 top
U2 "SN74LVC2G07DBVR" DBV0006A_N 4365.93,3502.55 r180 top
U3 "OPA4350EA/250" DBQ0016A_N 5382.31,3917.65 r180 top
U4 "REF5030IDGKT" DGK0008A_N 5437,3656 r270 top
U5 "CDCLVC1104PW" PW0008A_N 6056.85,5337.8 r270 bottom
U6 "TPS3702CX33DDCT" DDC0006A_N 6023.72,5533.71 r90 top
U7 "TPS3702CX12DDCT" DDC0006A_N 6172.72,5532.71 r90 top
U8 "TPS62420DRCR" DRC0010J 4426.86,3029.5 r0 top
U24 "SN74LVCH16T245DGGR" SOP50P810X120-48N 4701.86,5440.97 r0 top
U25 "SN74LVCH16T245DGGR" SOP50P810X120-48N 6514.87,4340.09 r180 top
U26 "SN74LVCH16T245DGGR" SOP50P810X120-48N 6514.01,5436.78 r180 top
U27 "SN74LVCH16T245DGGR" SOP50P810X120-48N 4703.85,4899.92 r0 top
U28 "SN74LVCH16T245DGGR" SOP50P810X120-48N 6514.01,4888.78 r180 top
Y1 "CMP-0082061-2" ECS_ECS-2520S 6048.67,5600.95 r180 bottom

## Footprints (in the part's own frame and the unit in brackets; to place one, negate y for a bottom-side part, rotate by r counter-clockwise, add the part's x,y. Pads: shape width x height; smd on the part's side, far side on the other; paste and mask are expansions set on the pad)
0402 [mm]
  rect 0.8x0.6 smd: 1(-0.6,0) 2(0.6,0)
  body extent -0.55,-0.3 0.55,0.3, height 0.6
0603 [mm]
  rect 1x0.95 smd: 1(-0.8,0) 2(0.8,0)
  body extent -0.87,-0.47 0.87,0.47, height 1
AMPHENOL_10144517-101802LF [mm] "Plug(male)"
  rect 0.5x2 smd: 1(19.6,2.2) 2(19.6,-2.2) 3(18.8,2.2) 4(18.8,-2.2) 5(18,2.2) 6(18,-2.2) 7(17.2,2.2) 8(17.2,-2.2) 9(16.4,2.2) 10(16.4,-2.2) 11(15.6,2.2) 12(15.6,-2.2) 13(14.8,2.2) 14(14.8,-2.2) 15(14,2.2) 16(14,-2.2) 17(13.2,2.2) 18(13.2,-2.2) 19(12.4,2.2) 20(12.4,-2.2) 21(11.6,2.2) 22(11.6,-2.2) 23(10.8,2.2) 24(10.8,-2.2) 25(10,2.2) 26(10,-2.2) 27(9.2,2.2) 28(9.2,-2.2) 29(8.4,2.2) 30(8.4,-2.2) 31(7.6,2.2) 32(7.6,-2.2) 33(6.8,2.2) 34(6.8,-2.2) 35(6,2.2) 36(6,-2.2) 37(5.2,2.2) 38(5.2,-2.2) 39(4.4,2.2) 40(4.4,-2.2) 41(3.6,2.2) 42(3.6,-2.2) 43(2.8,2.2) 44(2.8,-2.2) 45(2,2.2) 46(2,-2.2) 47(1.2,2.2) 48(1.2,-2.2) 49(0.4,2.2) 50(0.4,-2.2) 51(-0.4,2.2) 52(-0.4,-2.2) 53(-1.2,2.2) 54(-1.2,-2.2) 55(-2,2.2) 56(-2,-2.2) 57(-2.8,2.2) 58(-2.8,-2.2) 59(-3.6,2.2) 60(-3.6,-2.2) 61(-4.4,2.2) 62(-4.4,-2.2) 63(-5.2,2.2) 64(-5.2,-2.2) 65(-6,2.2) 66(-6,-2.2) 67(-6.8,2.2) 68(-6.8,-2.2) 69(-7.6,2.2) 70(-7.6,-2.2) 71(-8.4,2.2) 72(-8.4,-2.2) 73(-9.2,2.2) 74(-9.2,-2.2) 75(-10,2.2) 76(-10,-2.2) 77(-10.8,2.2) 78(-10.8,-2.2) 79(-11.6,2.2) 80(-11.6,-2.2) 81(-12.4,2.2) 82(-12.4,-2.2) 83(-13.2,2.2) 84(-13.2,-2.2) 85(-14,2.2) 86(-14,-2.2) 87(-14.8,2.2) 88(-14.8,-2.2) 89(-15.6,2.2) 90(-15.6,-2.2) 91(-16.4,2.2) 92(-16.4,-2.2) 93(-17.2,2.2) 94(-17.2,-2.2) 95(-18,2.2) 96(-18,-2.2) 97(-18.8,2.2) 98(-18.8,-2.2) 99(-19.6,2.2) 100(-19.6,-2.2)
  round 0.83 hole 0.83 unplated: ""(-22.1,0)
  round 1.23 hole 1.23 unplated: ""(22.1,0)
  silkscreen extent -22.9,-3 22.9,3.85, body extent -22.9,-3 22.9,3, height 3.65
CAPC0603(1608)100_L [mil] "Chip Capacitor, Body 1.6x0.8mm, Height 1.0mm, IPC High Density"
  rrect25% 26x29.92 smd: 1(-27.56,0) 2(27.56,0)
  silkscreen extent 0,-12 0,12, body extent -31,-16 31,16, height 37
CAPC0805(2012)145_L [mm] "Chip Capacitor, Body 2.0x1.2mm, Height 1.45mm, IPC High Density"
  rrect25% 0.76x1.3 smd: 1(-0.9,0) 2(0.89,0)
  silkscreen extent -0.19,-0.55 0.18,0.55, body extent -1,-0.6 1,0.6, height 1.45
CAPC1005X56X25LL10T15 [mm] "Chip Capacitor, 2-Leads, Body 1.10x0.60mm, IPC High Density"
  rect 0.58x0.54 smd: 1(-0.39,0) 2(0.39,0)
  body extent -0.55,-0.3 0.55,0.3, height 0.56
CAPC1608X90X40NL10T20 [mm] "Chip Capacitor, 2-Leads, Body 1.70x0.90mm, IPC Medium Density"
  rect 0.95x0.95 smd: 1(-0.625,0) 2(0.625,0)
  body extent -0.85,-0.45 0.85,0.45, height 0.9
CAPC2013X135X45NL10T25 [mm] "Chip Capacitor, 2-Leads, Body 2.10x1.35mm, IPC Medium Density"
  rect 1.2x1.4 smd: 1(-0.85,0) 2(0.85,0)
  body extent -1.05,-0.67 1.05,0.67, height 1.35
CFSH0520LTRPBFREE [mm]
  rect 0.55x0.6 smd: 1(-0.4,0) 2(0.4,0)
  silkscreen extent -1.2,-0.05 -1.1,0.05, body extent -0.5,-0.3 0.5,0.3, height 0.4
CPF0402 [mm]
  rect 0.5x0.6 smd: 1(-0.5,0) 2(0.5,0)
  body extent -0.55,-0.27 0.55,0.27, height 0.35
DBQ0016A_N [mm]
  oval 1.45x0.4 smd: 1(-2.725,2.222) 2(-2.725,1.587) 3(-2.725,0.952) 4(-2.725,0.317) 5(-2.725,-0.318) 6(-2.725,-0.953) 7(-2.725,-1.588) 8(-2.725,-2.223) 9(2.725,-2.222) 10(2.725,-1.587) 11(2.725,-0.952) 12(2.725,-0.317) 13(2.725,0.318) 14(2.725,0.953) 15(2.725,1.588) 16(2.725,2.223)
  silkscreen extent -1.88,-2.5 1.1,2.67, body extent -3.01,-2.45 3.01,2.45, height 1.63
DBV0006A_N [mm]
  rrect17% 1x0.6 smd: 1(-1.375,0.95) 2(-1.375,0) 3(-1.375,-0.95) 4(1.375,-0.95) 5(1.375,0) 6(1.375,0.95)
  silkscreen extent -0.72,-1.55 0.5,1.55, body extent -1.42,-1.46 1.42,1.46, height 1.12
DDC0006A_N [mm]
  rrect17% 1x0.6 smd: 1(-1.375,0.95) 2(-1.375,0) 3(-1.375,-0.95) 4(1.375,-0.95) 5(1.375,0) 6(1.375,0.95)
  silkscreen extent -0.69,-1.52 0.68,1.53, body extent -1.43,-1.48 1.43,1.49, height 0.92
DGK0008A_N [mm]
  oval 1.35x0.45 smd: 1(-2.225,0.975) 2(-2.225,0.325) 3(-2.225,-0.325) 4(-2.225,-0.975) 5(2.225,-0.975) 6(2.225,-0.325) 7(2.225,0.325) 8(2.225,0.975)
  silkscreen extent -1.71,-1.55 0.95,1.55, body extent -2.45,-1.5 2.45,1.5, height 0.96
DRC0010J [mm] "for TPS62420DRCR"
  oval 0.6x0.24 smd paste+0 mask+0.051: 1(-1.4,1) 2(-1.4,0.5) 3(-1.4,0) 4(-1.4,-0.5) 5(-1.4,-1) 6(1.4,-1) 7(1.4,-0.5) 8(1.4,0) 9(1.4,0.5) 10(1.4,1)
  rect 1.65x2.4 smd paste-1.187 mask+0.051: 11(0,0)
  round 0.5 / inner round 1.524 / far side round 0.5 hole 0.203 paste-2539.97 mask+0.051: V(-0.575,0) V(0,-0.95) V(0,0.95) V(0.575,0)
  Top Layer region: -0.135,1.1 -0.135,1.5 -0.365,1.5 -0.365,1.1
  Top Layer region: 0.135,1.5 0.135,1.1 0.365,1.1 0.365,1.5
  Top Layer region: -0.135,-1.5 -0.135,-1.1 -0.365,-1.1 -0.365,-1.5
  Top Layer region: 0.135,-1.1 0.135,-1.5 0.365,-1.5 0.365,-1.1
  silkscreen extent -1.7,-1.7 1.7,1.7
ECS_ECS-2520S [mm]
  rrect12% 0.8x0.9 smd: 1(-0.725,0.925) 2(-0.725,-0.925) 3(0.725,-0.925) 4(0.725,0.925)
  silkscreen extent -1.7,0.9 -1.5,1.1, body extent -1.05,-1.3 1.05,1.3, height 1
INDC2520X100X60NL20T20 [mm] "Chip Inductor, 2-Leads, Body 2.7x2.2mm, IPC Medium Density"
  rect 1.23x2.22 smd: 1(-1.085,0) 2(1.085,0)
  silkscreen extent -0.1,-1.01 0.1,1.01, body extent -1.35,-1.1 1.35,1.1, height 1
LEDC2012X70N [mm]
  rect 0.9x1.4 smd: 1(-0.95,0) 2(0.95,0)
  silkscreen extent -0.15,-1.05 0.15,1.05, body extent -1,0 1,0.7, height 0.5
MURA-BLM18-F-H1-CHIP-2_V [mm] "Chip Ferrite Bead, 2-Leads, Body 1.6x0.8mm, Height 0.95mm, Flow"
  rect 0.95x0.7 smd: 1(-0.825,0) 2(0.825,0)
  body extent -0.87,-0.48 0.87,0.48, height 0.95
POWERMITE [mil]
  rect 105x100 smd: 1(-46,0)
  rect 30x50 smd: 2(46,0)
  silkscreen extent -124,-63 -104,63, body extent -94,-40 59,40, height 45
PW0008A_N [mm]
  oval 1.4x0.45 smd: 1(-2.95,0.975) 2(-2.95,0.325) 3(-2.95,-0.325) 4(-2.95,-0.975) 5(2.95,-0.975) 6(2.95,-0.325) 7(2.95,0.325) 8(2.95,0.975)
  silkscreen extent -2.41,-1.55 1.85,1.55, body extent -3.21,-1.5 3.21,1.5, height 1.2
RESC0402(1005)_L [mm] "Chip Resistor, Body 1.0x0.5mm, IPC High Density"
  rrect25% 0.5x0.55 smd: 1(-0.45,0) 2(0.45,0)
  body extent -0.5,-0.25 0.5,0.25, height 0.3
RESC0805(2012)_L [mm] "Chip Resistor, Body 2.0x1.3mm, IPC High Density"
  rrect25% 0.76x1.3 smd: 1(-0.9,0) 2(0.89,0)
  silkscreen extent -0.19,-0.55 0.18,0.55, body extent -1,-0.62 1,0.63, height 0.6
RESC1005X40X25ML05T05 [mm] "Chip Resistor, 2-Leads, Body 1.05x0.55mm, IPC Low Density"
  rect 0.65x0.65 smd: 1(-0.5,0) 2(0.5,0)
  body extent -0.53,-0.28 0.53,0.28, height 0.4
RESC1608X55X25ML10T15 [mm] "Chip Resistor, 2-Leads, Body 1.70x0.90mm, IPC Low Density"
  rect 0.8x1 smd: 1(-0.75,0) 2(0.75,0)
  body extent -0.85,-0.45 0.85,0.45, height 0.55
SHDR10W66P254_2X5_2030X905X905P [mm]
  rect 1.725x1.725 hole 1.15: 1(0,0)
  round 1.725 hole 1.15: 2(0,2.54) 3(2.54,0) 4(2.54,2.54) 5(5.08,0) 6(5.08,2.54) 7(7.62,0) 8(7.62,2.54) 9(10.16,0) 10(10.16,2.54)
  silkscreen extent -5.07,-3.13 15.53,5.92, body extent -5.07,-3.25 15.23,5.79, height 9.05
SOP50P810X120-48N [mm]
  rect 1.475x0.3 smd: 1(-3.788,5.75) 2(-3.788,5.25) 3(-3.788,4.75) 4(-3.788,4.25) 5(-3.788,3.75) 6(-3.788,3.25) 7(-3.788,2.75) 8(-3.788,2.25) 9(-3.788,1.75) 10(-3.788,1.25) 11(-3.788,0.75) 12(-3.788,0.25) 13(-3.788,-0.25) 14(-3.788,-0.75) 15(-3.788,-1.25) 16(-3.788,-1.75) 17(-3.788,-2.25) 18(-3.788,-2.75) 19(-3.788,-3.25) 20(-3.788,-3.75) 21(-3.788,-4.25) 22(-3.788,-4.75) 23(-3.788,-5.25) 24(-3.788,-5.75) 25(3.788,-5.75) 26(3.788,-5.25) 27(3.788,-4.75) 28(3.788,-4.25) 29(3.788,-3.75) 30(3.788,-3.25) 31(3.788,-2.75) 32(3.788,-2.25) 33(3.788,-1.75) 34(3.788,-1.25) 35(3.788,-0.75) 36(3.788,-0.25) 37(3.788,0.25) 38(3.788,0.75) 39(3.788,1.25) 40(3.788,1.75) 41(3.788,2.25) 42(3.788,2.75) 43(3.788,3.25) 44(3.788,3.75) 45(3.788,4.25) 46(3.788,4.75) 47(3.788,5.25) 48(3.788,5.75)
  silkscreen extent -2.7,-6.25 2.7,6.25, body extent -4.06,-6.25 4.06,6.25, height 1.1
SULLINS_SBH11-PBPC-D07-ST-BK [mm]
  rect 1.508x1.508 / inner round 1.508 / far side rect 1.508x1.508 hole 1: 1(-7.62,-1.27)
  round 1.508 hole 1: 2(-7.62,1.27) 3(-5.08,-1.27) 4(-5.08,1.27) 5(-2.54,-1.27) 6(-2.54,1.27) 7(0,-1.27) 8(0,1.27) 9(2.54,-1.27) 10(2.54,1.27) 11(5.08,-1.27) 12(5.08,1.27) 13(7.62,-1.27) 14(7.62,1.27)
  silkscreen extent -12.64,-5.5 12.64,4.7, body extent -12.64,-4.39 12.64,4.7, height 9.09
SW_218-2LP [mm]
  rect 1.27x0.76 smd: 1(-3.81,0.635) 2(-3.81,-0.635) 3(3.81,-0.635) 4(3.81,0.635)
  silkscreen extent -2.9,-1.86 2.9,2.09, body extent -4.22,-1.86 4.22,1.85, height 2.62
SW_B3U-1100P [mm]
  rect 0.8x1.8 smd: 1(-1.7,0) 2(1.7,0)
  rect 0.8x1.2 smd: 3(0,1.65)
  silkscreen extent -0.95,-1.25 0.95,1.25, body extent -2,-1.25 2,1.9, height 1.6
SW_CAS-D20TA [mm]
  rect 1.6x1 smd: 1(-1.85,1.75) 2(-1.85,0) 3(-1.85,-1.75) 4(1.85,1.75) 5(1.85,0) 6(1.85,-1.75)
  silkscreen extent -1.95,-2.7 1.95,2.9, body extent -2.1,-2.7 2.1,2.7, height 2.5
TP_50MIL-25MILHOLE [mil]
  round 50 hole 25: 1(0,0)
WL-SMCW_RED_0805 [mm]
  rect 1.1x1.2 smd: 1(-1.05,0) 2(1.05,0)
  silkscreen extent -2.4,-1.1 1.5,1.1, body extent -1,-0.62 1,0.63, height 0.7
ZWT0337A-IPC_B [mm] "for F28388DZWTS"
  round 0.4 smd paste+0 mask+0: A1(-7.2,7.2) A2(-6.4,7.2) A3(-5.6,7.2) A4(-4.8,7.2) A5(-4,7.2) A6(-3.2,7.2) A7(-2.4,7.2) A8(-1.6,7.2) A9(-0.8,7.2) A10(0,7.2) A11(0.8,7.2) A12(1.6,7.2) A13(2.4,7.2) A14(3.2,7.2) A15(4,7.2) A16(4.8,7.2) A17(5.6,7.2) A18(6.4,7.2) A19(7.2,7.2) B1(-7.2,6.4) B2(-6.4,6.4) B3(-5.6,6.4) B4(-4.8,6.4) B5(-4,6.4) B6(-3.2,6.4) B7(-2.4,6.4) B8(-1.6,6.4) B9(-0.8,6.4) B10(0,6.4) B11(0.8,6.4) B12(1.6,6.4) B13(2.4,6.4) B14(3.2,6.4) B15(4,6.4) B16(4.8,6.4) B17(5.6,6.4) B18(6.4,6.4) B19(7.2,6.4) C1(-7.2,5.6) C2(-6.4,5.6) C3(-5.6,5.6) C4(-4.8,5.6) C5(-4,5.6) C6(-3.2,5.6) C7(-2.4,5.6) C8(-1.6,5.6) C9(-0.8,5.6) C10(0,5.6) C11(0.8,5.6) C12(1.6,5.6) C13(2.4,5.6) C14(3.2,5.6) C15(4,5.6) C16(4.8,5.6) C17(5.6,5.6) C18(6.4,5.6) C19(7.2,5.6) D1(-7.2,4.8) D2(-6.4,4.8) D3(-5.6,4.8) D4(-4.8,4.8) D5(-4,4.8) D6(-3.2,4.8) D7(-2.4,4.8) D8(-1.6,4.8) D9(-0.8,4.8) D10(0,4.8) D11(0.8,4.8) D12(1.6,4.8) D13(2.4,4.8) D14(3.2,4.8) D15(4,4.8) D16(4.8,4.8) D17(5.6,4.8) D18(6.4,4.8) D19(7.2,4.8) E1(-7.2,4) E2(-6.4,4) E3(-5.6,4) E4(-4.8,4) E5(-4,4) E6(-3.2,4) E7(-2.4,4) E8(-1.6,4) E9(-0.8,4) E10(0,4) E11(0.8,4) E12(1.6,4) E13(2.4,4) E14(3.2,4) E15(4,4) E16(4.8,4) E17(5.6,4) E18(6.4,4) E19(7.2,4) F1(-7.2,3.2) F2(-6.4,3.2) F3(-5.6,3.2) F4(-4.8,3.2) F5(-4,3.2) F6(-3.2,3.2) F7(-2.4,3.2) F8(-1.6,3.2) F9(-0.8,3.2) F10(0,3.2) F11(0.8,3.2) F12(1.6,3.2) F13(2.4,3.2) F14(3.2,3.2) F15(4,3.2) F16(4.8,3.2) F17(5.6,3.2) F18(6.4,3.2) F19(7.2,3.2) G1(-7.2,2.4) G2(-6.4,2.4) G3(-5.6,2.4) G4(-4.8,2.4) G5(-4,2.4) G6(-3.2,2.4) G14(3.2,2.4) G15(4,2.4) G16(4.8,2.4) G17(5.6,2.4) G18(6.4,2.4) G19(7.2,2.4) H1(-7.2,1.6) H2(-6.4,1.6) H3(-5.6,1.6) H4(-4.8,1.6) H5(-4,1.6) H6(-3.2,1.6) H8(-1.6,1.6) H9(-0.8,1.6) H10(0,1.6) H11(0.8,1.6) H12(1.6,1.6) H14(3.2,1.6) H15(4,1.6) H16(4.8,1.6) H17(5.6,1.6) H18(6.4,1.6) H19(7.2,1.6) J1(-7.2,0.8) J2(-6.4,0.8) J3(-5.6,0.8) J4(-4.8,0.8) J5(-4,0.8) J6(-3.2,0.8) J8(-1.6,0.8) J9(-0.8,0.8) J10(0,0.8) J11(0.8,0.8) J12(1.6,0.8) J14(3.2,0.8) J15(4,0.8) J16(4.8,0.8) J17(5.6,0.8) J18(6.4,0.8) J19(7.2,0.8) K1(-7.2,0) K2(-6.4,0) K3(-5.6,0) K4(-4.8,0) K5(-4,0) K6(-3.2,0) K8(-1.6,0) K9(-0.8,0) K10(0,0) K11(0.8,0) K12(1.6,0) K14(3.2,0) K15(4,0) K16(4.8,0) K17(5.6,0) K18(6.4,0) K19(7.2,0) L1(-7.2,-0.8) L2(-6.4,-0.8) L3(-5.6,-0.8) L4(-4.8,-0.8) L5(-4,-0.8) L6(-3.2,-0.8) L8(-1.6,-0.8) L9(-0.8,-0.8) L10(0,-0.8) L11(0.8,-0.8) L12(1.6,-0.8) L14(3.2,-0.8) L15(4,-0.8) L16(4.8,-0.8) L17(5.6,-0.8) L18(6.4,-0.8) L19(7.2,-0.8) M1(-7.2,-1.6) M2(-6.4,-1.6) M3(-5.6,-1.6) M4(-4.8,-1.6) M5(-4,-1.6) M6(-3.2,-1.6) M8(-1.6,-1.6) M9(-0.8,-1.6) M10(0,-1.6) M11(0.8,-1.6) M12(1.6,-1.6) M14(3.2,-1.6) M15(4,-1.6) M16(4.8,-1.6) M17(5.6,-1.6) M18(6.4,-1.6) M19(7.2,-1.6) N1(-7.2,-2.4) N2(-6.4,-2.4) N3(-5.6,-2.4) N4(-4.8,-2.4) N5(-4,-2.4) N6(-3.2,-2.4) N14(3.2,-2.4) N15(4,-2.4) N16(4.8,-2.4) N17(5.6,-2.4) N18(6.4,-2.4) N19(7.2,-2.4) P1(-7.2,-3.2) P2(-6.4,-3.2) P3(-5.6,-3.2) P4(-4.8,-3.2) P5(-4,-3.2) P6(-3.2,-3.2) P7(-2.4,-3.2) P8(-1.6,-3.2) P9(-0.8,-3.2) P10(0,-3.2) P11(0.8,-3.2) P12(1.6,-3.2) P13(2.4,-3.2) P14(3.2,-3.2) P15(4,-3.2) P16(4.8,-3.2) P17(5.6,-3.2) P18(6.4,-3.2) P19(7.2,-3.2) R1(-7.2,-4) R2(-6.4,-4) R3(-5.6,-4) R4(-4.8,-4) R5(-4,-4) R6(-3.2,-4) R7(-2.4,-4) R8(-1.6,-4) R9(-0.8,-4) R10(0,-4) R11(0.8,-4) R12(1.6,-4) R13(2.4,-4) R14(3.2,-4) R15(4,-4) R16(4.8,-4) R17(5.6,-4) R18(6.4,-4) R19(7.2,-4) T1(-7.2,-4.8) T2(-6.4,-4.8) T3(-5.6,-4.8) T4(-4.8,-4.8) T5(-4,-4.8) T6(-3.2,-4.8) T7(-2.4,-4.8) T8(-1.6,-4.8) T9(-0.8,-4.8) T10(0,-4.8) T11(0.8,-4.8) T12(1.6,-4.8) T13(2.4,-4.8) T14(3.2,-4.8) T15(4,-4.8) T16(4.8,-4.8) T17(5.6,-4.8) T18(6.4,-4.8) T19(7.2,-4.8) U1(-7.2,-5.6) U2(-6.4,-5.6) U3(-5.6,-5.6) U4(-4.8,-5.6) U5(-4,-5.6) U6(-3.2,-5.6) U7(-2.4,-5.6) U8(-1.6,-5.6) U9(-0.8,-5.6) U10(0,-5.6) U11(0.8,-5.6) U12(1.6,-5.6) U13(2.4,-5.6) U14(3.2,-5.6) U15(4,-5.6) U16(4.8,-5.6) U17(5.6,-5.6) U18(6.4,-5.6) U19(7.2,-5.6) V1(-7.2,-6.4) V2(-6.4,-6.4) V3(-5.6,-6.4) V4(-4.8,-6.4) V5(-4,-6.4) V6(-3.2,-6.4) V7(-2.4,-6.4) V8(-1.6,-6.4) V9(-0.8,-6.4) V10(0,-6.4) V11(0.8,-6.4) V12(1.6,-6.4) V13(2.4,-6.4) V14(3.2,-6.4) V15(4,-6.4) V16(4.8,-6.4) V17(5.6,-6.4) V18(6.4,-6.4) V19(7.2,-6.4) W1(-7.2,-7.2) W2(-6.4,-7.2) W3(-5.6,-7.2) W4(-4.8,-7.2) W5(-4,-7.2) W6(-3.2,-7.2) W7(-2.4,-7.2) W8(-1.6,-7.2) W9(-0.8,-7.2) W10(0,-7.2) W11(0.8,-7.2) W12(1.6,-7.2) W13(2.4,-7.2) W14(3.2,-7.2) W15(4,-7.2) W16(4.8,-7.2) W17(5.6,-7.2) W18(6.4,-7.2) W19(7.2,-7.2)
  silkscreen extent -8.62,-8 8,8

## Part data
C1 C2 C3 C4 C5 C6 C7 C8 C9 C10 C11 C12 C13 C14 C15 C16 C17 C18 C19 C20 C21 C22 C23 C24: library part CMP-0006920-4, "CAP, CERM, 330 pF, 50 V, +/- 5%, C0G/NP0, 0603", Cap_Case=0603, Manufacturer=Kemet, Supplier Part Number 1=399-1068-1-ND, TempCo=C0G/NP0, Tolerance_%=5%, Value1=Unknown, Value2=50V, ValueDisplayed=330pF, AEC Category=Q200, AEC Qualified=?, Cap_F=330pF, ComponentLink1Description="Datasheet link", ComponentLink1URL=http://www.kemet.com/kemet/web/homepage/kechome.nsf/vapubfiles/F3102_Y5V.pdf/$file/F3102_Y5V.pdf, CompType=Capacitor, LatestRevisionDate=2017-03-09, MountType=SMT, PackageReference=0603, PartNumber=C0603C331J5GACTU, Polarized=N, Published=2008-06-19, Publisher="Texas Instruments", RoHS=Y, SizeArea_mm2=1.28, SizeAreaWB_mm2=4.68, SizeX_mm=1.6, SizeY_mm=0.8, SizeZ_mm=1, Supplier 1=Digi-Key, Supplier 2=Mouser, Supplier 3=Farnell, Supplier Part Number 2=80-C0603C331J5G, Supplier Part Number 3=1414634, TaMax_C=125°C, TaMin_C=-55°C, Technology=Ceramic, U/M=EA
C25 C30: library part CMP-0006862-5, "CAP, CERM, 0.1 uF, 10 V, +/- 10%, X7R, 0603", Cap_Case=0603, Manufacturer=Kemet, Supplier Part Number 1=399-1095-1-ND, TempCo=X7R, Tolerance_%=10%, Value1=Unknown, Value2=10V, ValueDisplayed=0.1uF, AEC Category=Q200, AEC Qualified=?, Cap_F=100nF, ComponentLink1Description="Datasheet link", ComponentLink1URL=http://www.kemet.com/kemet/web/homepage/kechome.nsf/vapubfiles/F3102_Y5V.pdf/$file/F3102_Y5V.pdf, CompType=Capacitor, LatestRevisionDate=2017-03-09, MountType=SMT, PackageReference=0603, PartNumber=C0603C104K8RACTU, Polarized=N, Published=2008-06-19, Publisher="Texas Instruments", RoHS=Y, SizeArea_mm2=1.28, SizeAreaWB_mm2=4.68, SizeX_mm=1.6, SizeY_mm=0.8, SizeZ_mm=1, Supplier 1=Digi-Key, Supplier 2=Mouser, Supplier 3=Farnell, Supplier Part Number 2=80-C0603C104K8R, Supplier Part Number 3=1640032, TaMax_C=125°C, TaMin_C=-55°C, Technology=Ceramic, U/M=EA
C26 C27 C28 C29: library part CMP-0007324-5, "CAP, CERM, 22 uF, 10 V, +/- 20%, X5R, 0603", Cap_Case=0603, Manufacturer=MuRata, Supplier Part Number 1=490-10476-1-ND, TempCo=X5R, Tolerance_%=20%, Value1=Unknown, Value2=10V, ValueDisplayed=22uF, AEC Category=Q200, AEC Qualified=?, Cap_F=22μF, ComponentLink1Description="Datasheet link", ComponentLink1URL=http://psearch.murata.com/capacitor/product/GRM188R61A226ME15%23.pdf, CompType=Capacitor, LatestRevisionDate=2017-03-09, MountType=SMT, PackageReference=0603, PartNumber=GRM188R61A226ME15D, Polarized=N, Published=2008-06-19, Publisher="Texas Instruments", RoHS=Y, SizeArea_mm2=1.28, SizeAreaWB_mm2=4.68, SizeX_mm=1.6, SizeY_mm=0.8, SizeZ_mm=1, Supplier 1=Digi-Key, Supplier 2=Newark, Supplier 3=Mouser, Supplier Part Number 2=68X2786, Supplier Part Number 3=81-GRM188R61A226ME5D, TaMax_C=85°C, TaMin_C=-55°C, Technology=Ceramic, U/M=EA
C31: library part CMP-0006907-5, "CAP, CERM, 2.2 uF, 6.3 V, +/- 10%, X5R, 0603", Cap_Case=0603, Manufacturer=Kemet, Supplier Part Number 1=399-3362-1-ND, TempCo=X5R, Tolerance_%=10%, Value1=Unknown, Value2=6.3V, ValueDisplayed=2.2uF, AEC Category=Q200, AEC Qualified=?, Cap_F=2.2μF, ComponentLink1Description="Datasheet link", ComponentLink1URL=http://www.kemet.com/kemet/web/homepage/kechome.nsf/vapubfiles/F3102_Y5V.pdf/$file/F3102_Y5V.pdf, CompType=Capacitor, LatestRevisionDate=2017-03-09, MountType=SMT, PackageReference=0603, PartNumber=C0603C225K9PACTU, Polarized=N, Published=2008-06-19, Publisher="Texas Instruments", RoHS=Y, SizeArea_mm2=1.28, SizeAreaWB_mm2=4.68, SizeX_mm=1.6, SizeY_mm=0.8, SizeZ_mm=1, Supplier 1=Digi-Key, Supplier 2=Mouser, Supplier 3=Farnell, Supplier Part Number 2=80-C0603C225K9P, Supplier Part Number 3=1288257, TaMax_C=85°C, TaMin_C=-55°C, Technology=Ceramic, U/M=EA
C32 C33 C34: library part CMP-0006871-4, "CAP, CERM, 1 uF, 6.3 V, +80/-20%, Y5V, 0603", Cap_Case=0603, Manufacturer=Kemet, Supplier Part Number 1=399-3217-1-ND, TempCo=Y5V, Tolerance_%=80%, Value1=Unknown, Value2=6.3V, ValueDisplayed=1uF, AEC Category=Q200, AEC Qualified=?, Cap_F=1μF, ComponentLink1Description="Datasheet link", ComponentLink1URL=http://www.kemet.com/kemet/web/homepage/kechome.nsf/vapubfiles/F3102_Y5V.pdf/$file/F3102_Y5V.pdf, CompType=Capacitor, LatestRevisionDate=2017-03-09, MountType=SMT, PackageReference=0603, PartNumber=C0603C105Z9VACTU, Polarized=N, Published=2008-06-19, Publisher="Texas Instruments", RoHS=Y, SizeArea_mm2=1.28, SizeAreaWB_mm2=4.68, SizeX_mm=1.6, SizeY_mm=0.8, SizeZ_mm=1, Supplier 1=Digi-Key, Supplier 2=Mouser, Supplier 3=Farnell, Supplier Part Number 2=80-C0603C105Z9V, Supplier Part Number 3=1515067, TaMax_C=85°C, TaMin_C=-30°C, Technology=Ceramic, U/M=EA
C35 C37: library part CMP-0007324-5, "CAP, CERM, 22 uF, 10 V, +/- 20%, X5R, 0603", Cap_Case=0603, Manufacturer=MuRata, Supplier Part Number 1=490-10476-1-ND, TempCo=X5R, Tolerance_%=20%, Value1=Unknown, Value2=10V, ValueDisplayed=22uF/C0603, AEC Category=Q200, AEC Qualified=?, Cap_F=22μF, ComponentLink1Description="Datasheet link", ComponentLink1URL=http://psearch.murata.com/capacitor/product/GRM188R61A226ME15%23.pdf, CompType=Capacitor, LatestRevisionDate=2017-03-09, MountType=SMT, PackageReference=0603, PartNumber=GRM188R61A226ME15D, Polarized=N, Published=2008-06-19, Publisher="Texas Instruments", RoHS=Y, SizeArea_mm2=1.28, SizeAreaWB_mm2=4.68, SizeX_mm=1.6, SizeY_mm=0.8, SizeZ_mm=1, Supplier 1=Digi-Key, Supplier 2=Newark, Supplier 3=Mouser, Supplier Part Number 2=68X2786, Supplier Part Number 3=81-GRM188R61A226ME5D, TaMax_C=85°C, TaMin_C=-55°C, Technology=Ceramic, U/M=EA
C36: library part CMP-0006213-2, "CAP, CERM, 33 pF, 25 V, +/- 5%, C0G/NP0, 0402", Cap_Case=0402, Manufacturer="Wurth Elektronik", Supplier Part Number 1=710-885012005043, TempCo=C0G/NP0, Tolerance_%=5%, Value1=Unknown, Value2=25V, ValueDisplayed=33pF/C0402, AEC Category=Q200, AEC Grade=N/A, AEC Qualified=N, Cap_F=33pF, ComponentLink1Description="Datasheet link", ComponentLink1URL=http://katalog.we-online.de/pbs/datasheet/885012005043.pdf, CompType=Capacitor, LatestRevisionDate=2017-03-09, MountType=SMT, PackageReference=0402, PartNumber=885012005043, Polarized=N, Published=2008-06-19, Publisher="Texas Instruments", RoHS=Y, SizeArea_mm2=0.5, SizeAreaWB_mm2=3, SizeX_mm=1, SizeY_mm=0.5, SizeZ_mm=0.6, Supplier 1=Mouser, TaMax_C=125°C, TaMin_C=-55°C, Technology=Ceramic, U/M=EA, VDC_V=25V
C38 C40 C41 C44 C45 C46 C47 C48 C49 C50 C51 C52 C55 C56 C57 C58 C59 C60 C61 C62 C63 C64 C65 C66 C67 C68 C69 C70: library part CMP-001-00001-6, "Chip Capacitor, 0.1 uF, +/- 5%, 16 V, 0402 (1005 Metric)", Capacitor Type=Ceramic, Case/Package=0402, Max Operating Temperature=125°C, Min Operating Temperature=-55°C, Tolerance=5%, Voltage Rating=16V, Mounting Technology=SM, Pins=2, RoHS Compliant=True
C39: library part CMP-001-00081-4, "Chip Capacitor, 22μF +/-40%, 16V, 0805, Thickness 1.45 mm", Case/Package=0805, Max Operating Temperature=85°C, Min Operating Temperature=-55°C, Tolerance=5%, Voltage Rating=16V, Mounting Technology=SMT, Pins=2
C42 C43 C53 C54: library part CMP-0006906-5, "CAP, CERM, 2.2 uF, 10 V, +/- 10%, X5R, 0603", Cap_Case=0603, Manufacturer=Kemet, Supplier Part Number 1=399-4911-1-ND, TempCo=X5R, Tolerance_%=10%, Value1=Unknown, Value2=10V, ValueDisplayed=2.2uF/C0603, AEC Category=Q200, AEC Qualified=?, Cap_F=2.2μF, ComponentLink1Description="Datasheet link", ComponentLink1URL=http://www.kemet.com/kemet/web/homepage/kechome.nsf/vapubfiles/F3102_Y5V.pdf/$file/F3102_Y5V.pdf, CompType=Capacitor, LatestRevisionDate=2017-03-09, MountType=SMT, PackageReference=0603, PartNumber=C0603C225K8PACTU, Polarized=N, Published=2008-06-19, Publisher="Texas Instruments", RoHS=Y, SizeArea_mm2=1.28, SizeAreaWB_mm2=4.68, SizeX_mm=1.6, SizeY_mm=0.8, SizeZ_mm=1, Supplier 1=Digi-Key, Supplier 2=Mouser, Supplier 3=Farnell, Supplier Part Number 2=80-C0603C225K8P, Supplier Part Number 3=1108322, TaMax_C=85°C, TaMin_C=-55°C, Technology=Ceramic, U/M=EA
C71 C72: library part CMP-001-00075-4, "Chip Capacitor, 10μF +/-20%, 10V, 0603, Thickness 1 mm", Case/Package=0603, Max Operating Temperature=85°C, Min Operating Temperature=-55°C, Tolerance=10%, Voltage Rating=10V, Mounting Technology=SMT, Pins=2
C73 C75 C77 C78: library part CMP-0006343-2, "CAP, CERM, 0.1 uF, 10 V, +/- 10%, X7R, 0402", Cap_Case=0402, Manufacturer="Samsung Electro-Mechanics", TempCo=X7R, Tolerance_%=10%, Value1=Unknown, Value2=10V, ValueDisplayed=0.1uF, AEC Category=Q200, AEC Grade=N/A, AEC Qualified=N, Cap_F=100nF, ComponentLink1Description="Datasheet link", ComponentLink1URL=http://www.samsungsem.com/kr/front/downloadcms.do?path=/kr/support/product-search/mlcc/__icsFiles/afieldfile/2014/11/05&fileName=S_CL05B104KP5NNNC.pdf, CompType=Capacitor, LatestRevisionDate=2017-03-09, MountType=SMT, PackageReference=0402, PartNumber=CL05B104KP5NNNC, Polarized=N, Published=2008-06-19, Publisher="Texas Instruments", RoHS=Y, SizeArea_mm2=0.5, SizeAreaWB_mm2=3, SizeX_mm=1, SizeY_mm=0.5, SizeZ_mm=0.6, TaMax_C=125°C, TaMin_C=-55°C, Technology=Ceramic, U/M=EA, VDC_V=10V
C74 C76: library part CMP-0006236-2, "CAP, CERM, 0.01 uF, 50 V, +/- 5%, X7R, 0402", Cap_Case=0402, Manufacturer=Kemet, Supplier Part Number 1=399-7758-1-ND, TempCo=X7R, Tolerance_%=5%, Value1=Unknown, Value2=50V, ValueDisplayed=0.01uF, AEC Category=Q200, AEC Qualified=?, Cap_F=10nF, ComponentLink1Description="Datasheet link", ComponentLink1URL=http://www.kemet.com/Lists/ProductCatalog/Attachments/53/KEM_C1002_X7R_SMD.pdf, CompType=Capacitor, LatestRevisionDate=2017-03-09, MountType=SMT, PackageReference=0402, PartNumber=C0402C103J5RACTU, Polarized=N, Published=2008-06-19, Publisher="Texas Instruments", RoHS=Y, SizeArea_mm2=0.5, SizeAreaWB_mm2=3, SizeX_mm=1, SizeY_mm=0.5, SizeZ_mm=0.6, Supplier 1=Digi-Key, Supplier 2=Newark, Supplier 3=Mouser, Supplier Part Number 2=57J0044, Supplier Part Number 3=80-C0402C103J5R, TaMax_C=125°C, TaMin_C=-55°C, Technology=Ceramic, U/M=EA
C163 C164 C165: library part CMP-001-00007-7, "Chip Capacitor, 1 uF, +/- 10%, 50 V, 0805 (2012 Metric)", Capacitor Type=Ceramic, Case/Package=0805, Max Operating Temperature=125°C, Min Operating Temperature=-55°C, Tolerance=10%, Voltage Rating=50V, Mounting Technology=SM, Pins=2, RoHS Compliant=True
C166 C167 C168 C169 C170 C171 C172 C173 C174 C175 C176 C177 C178 C179 C180 C181 C182 C183 C184 C185: library part CMP-001-00017-6, "Chip Capacitor, 100 nF, +/- 10%, 50 V, 0603 (1608 Metric)", Capacitor Type=Ceramic, Case/Package=0603, Max Operating Temperature=125°C, Min Operating Temperature=-55°C, Tolerance=10%, Voltage Rating=50V, Mounting Technology=SM, Pins=2, RoHS Compliant=True
D1: "Diode, Schottky, 10 V, 1 A, AEC-Q101, POWERMITE", Case/Package=POWERMITE, Manufacturer="ON Semiconductor", PartNumber=MBRM110ET1G, Value1=1A, Value2=0.53V, AEC Category=Q101, AEC Qualified=Y, Available Preview Images=2D, ComponentLink1Description="Datasheet link", ComponentLink1URL=http://www.onsemi.com/pub_link/Collateral/MBRM110E-D.PDF, CompType=Diode, Design Item ID=CMP-0028747-2, Green_EU RoHS=Incomplete, Green_EU RoHS-2=Incomplete, Green_Lifecycle="Not Set", Green_REACh=Incomplete, Io_A=1A, MountType=SMT, RoHS=Y, SizeArea_mm2=7.995, SizeAreaWB_mm2=14.945, SizeX_mm=3.9, SizeY_mm=2.05, SizeZ_mm=1.15, Source=MCU063B.SCHLIB, TJmax_C=150°C, Type=Schottky, Vf_V=530mV, Vr_V=10V